# Allegro board RD_T31_STORK_M_V1.0_20190711B.brd
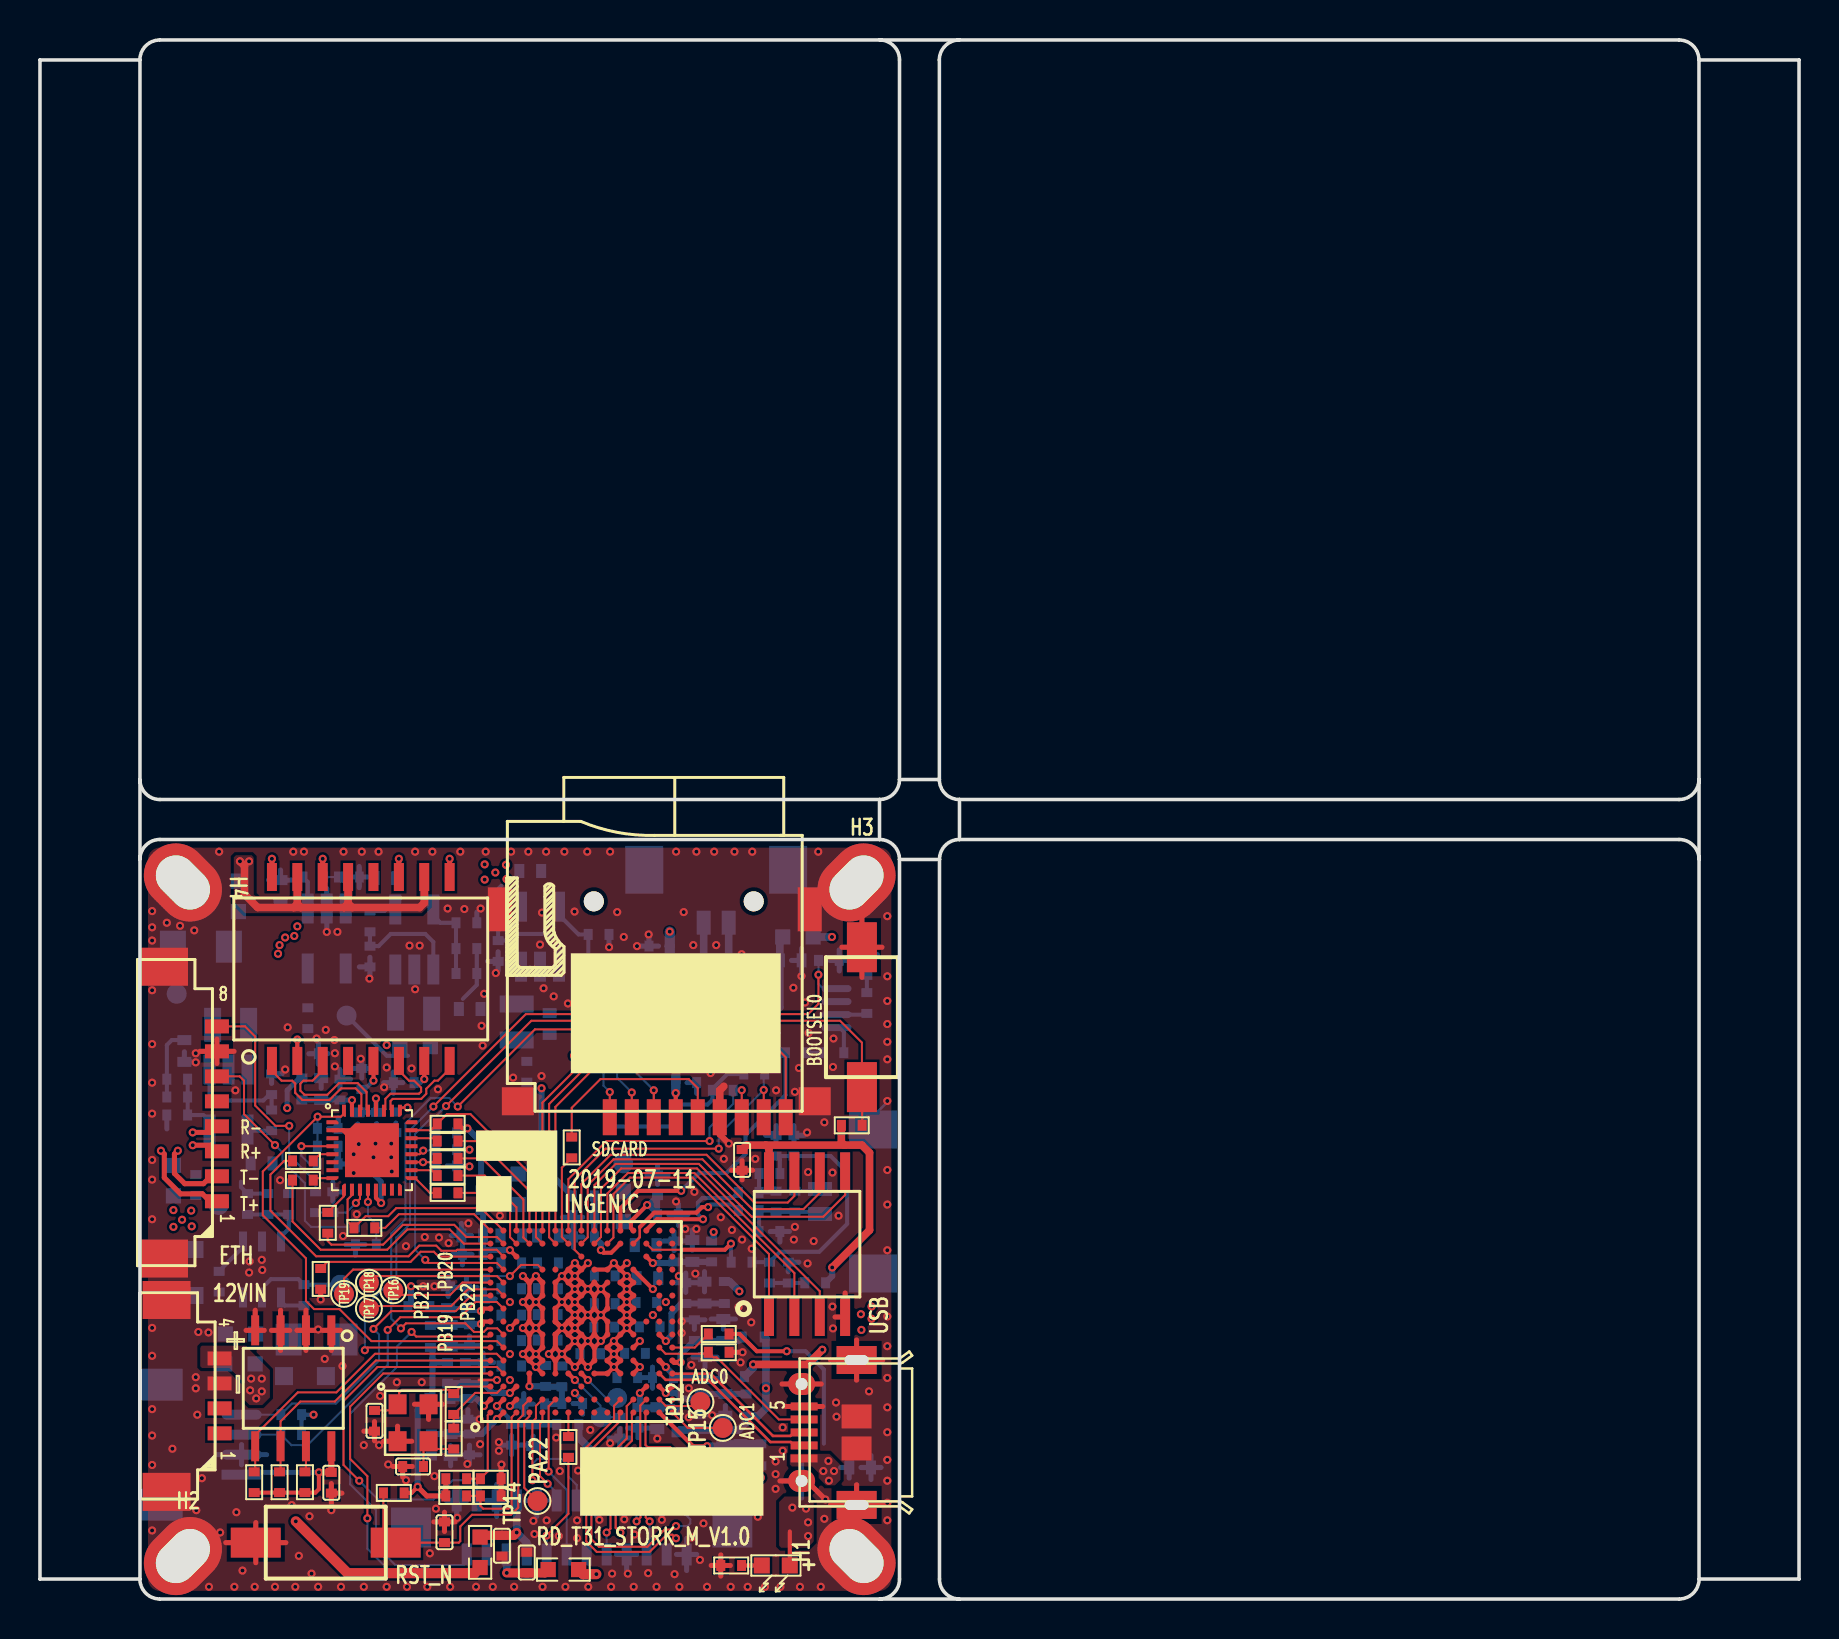
[diagram p0: board, top side]
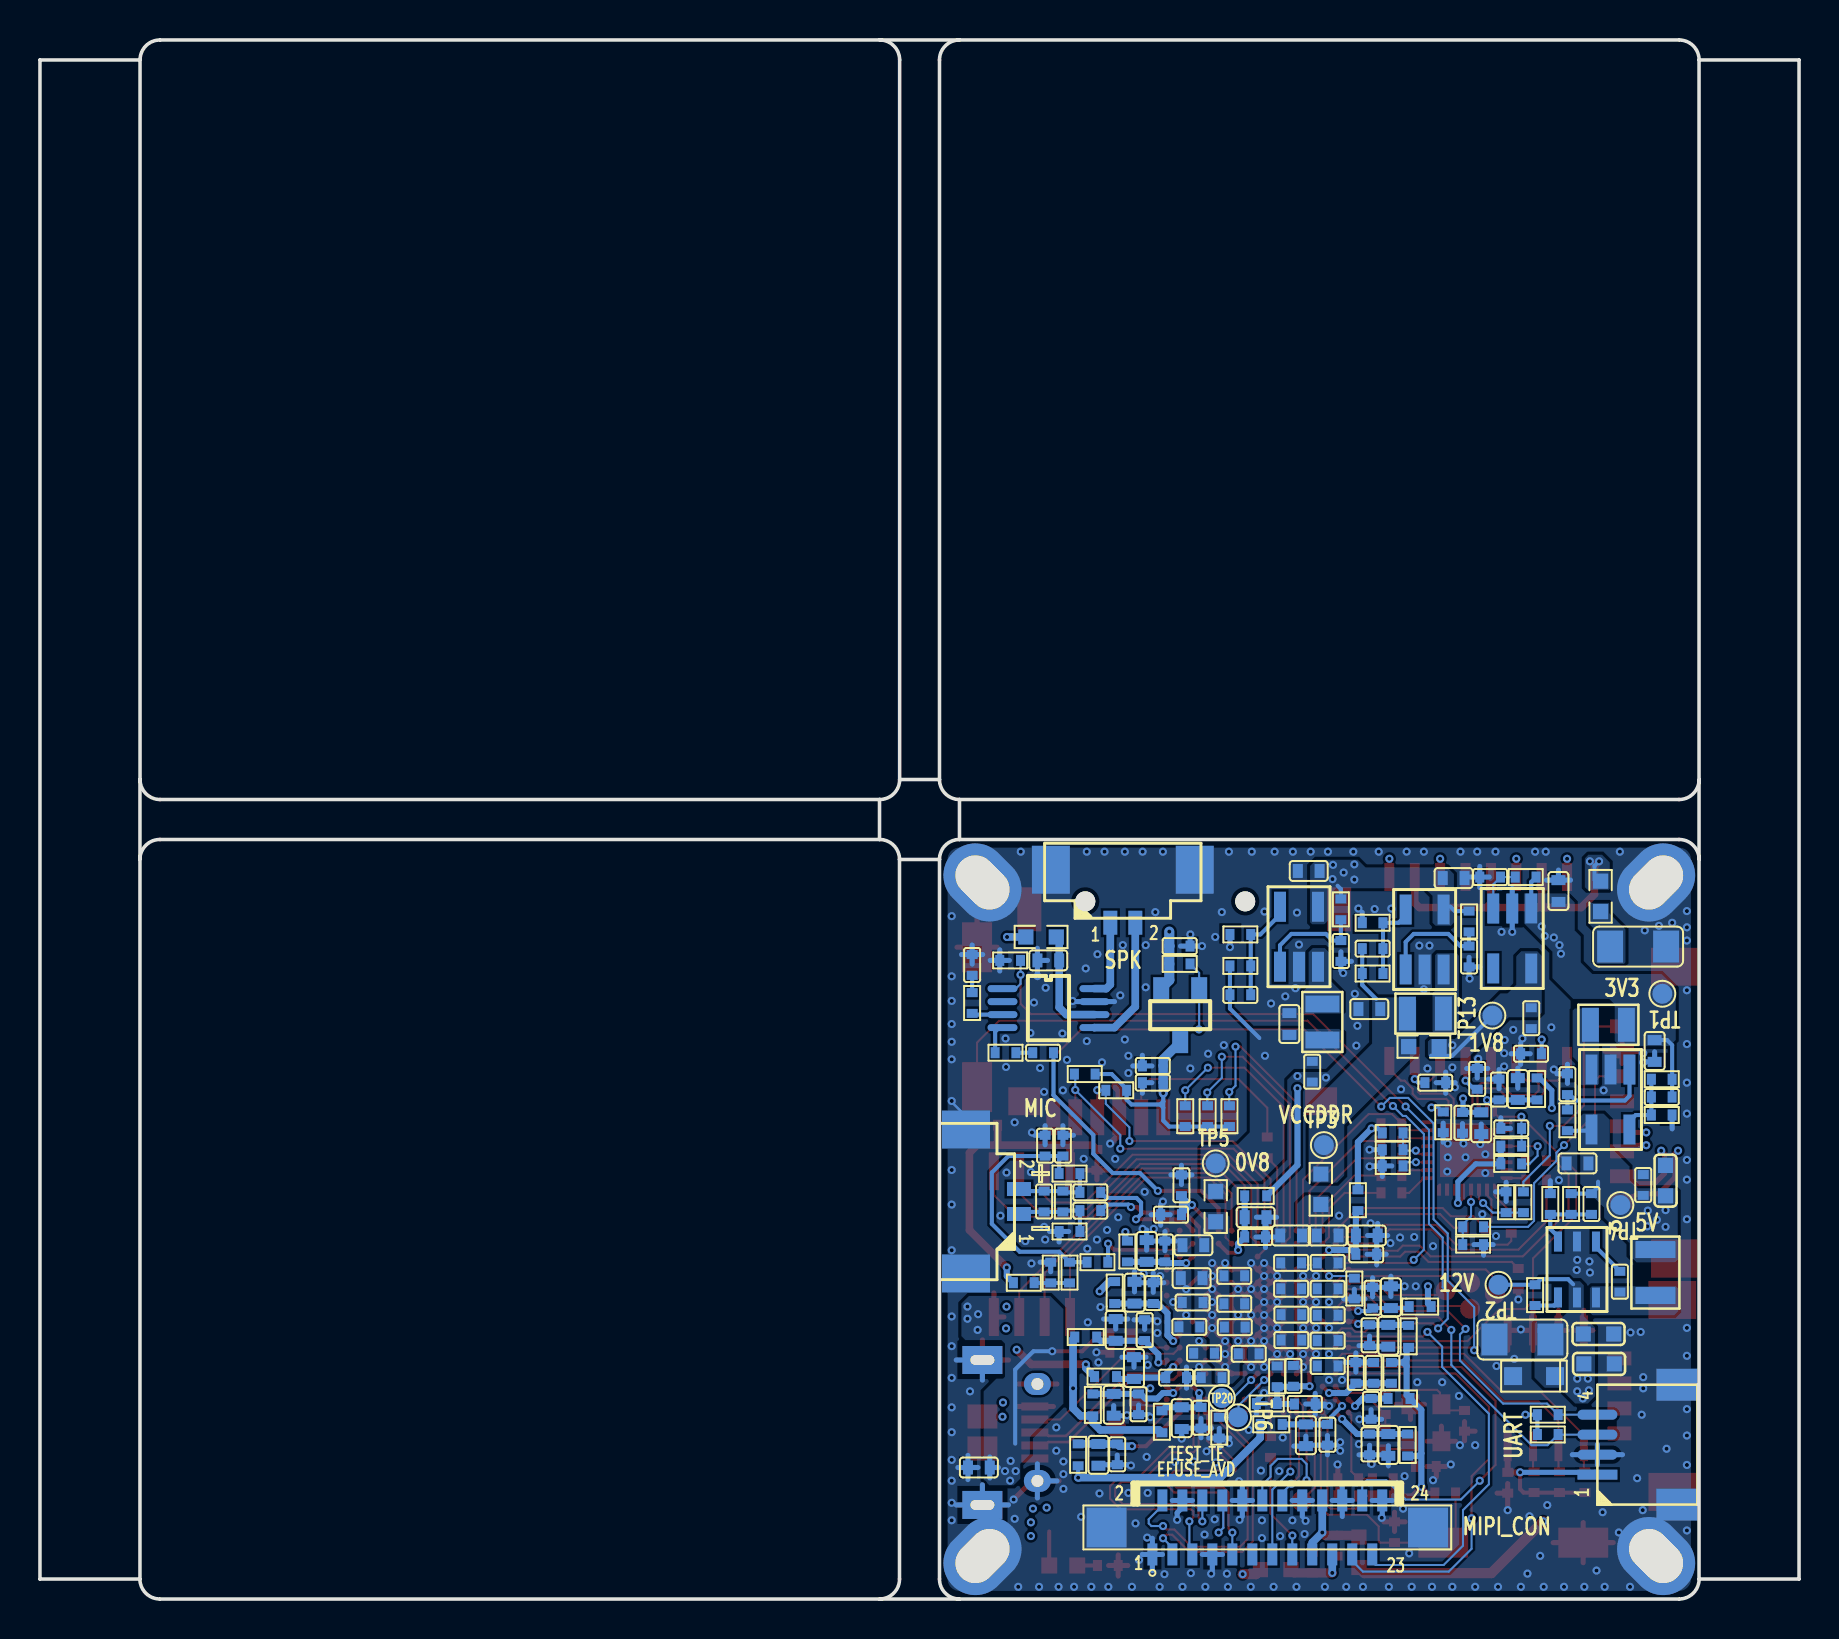
[diagram p1: board, bottom side, seen from below]

Outline 88 x 78 mm; copper layers: TOP, L2_GND, L3_PWR, BOTTOM. Coordinates in mm from the lower left corner of the outline.
Outline path: 5,1 0,1 0,77 5,77 ; 5,1 5,37 ; 5,1 arc(5.29,0.29) 6,0 42,0 ; 5,77 5,41 ; 5,77 arc(5.29,77.71) 6,78 42,78 ; 5,41 5,37 ; 5,41 arc(5.29,40.29) 6,40 42,40 ; 5,37 arc(5.29,37.71) 6,38 42,38 ; 42,40 42,38 ; 42,40 arc(42.71,40.29) 43,41 ; 42,38 arc(42.71,37.71) 43,37 ; 42,78 arc(42.71,77.71) 43,77 43,41 ; 42,78 45.99,78 ; 45.99,78 arc(45.29,77.71) 44.99,77 44.99,41 ; 45.99,78 81.99,78 arc(82.7,77.71) 82.99,77 ; 43,37 43,1 arc(42.71,0.29) 42,0 ; 43,37 45,37 ; 42,0 46,0 ; 46,0 arc(45.29,0.29) 45,1 45,37 ; 46,0 82,0 arc(82.71,0.29) 83,1 ; 43,41 44.99,41 ; 44.99,41 arc(45.29,40.29) 45.99,40 ; 45,37 arc(45.29,37.71) 46,38 ; 46,38 46,39.99 45.99,40 ; 46,38 82,38 arc(82.71,37.71) 83,37 ; 45.99,40 81.99,40 arc(82.7,40.29) 82.99,41 ; 82.99,77 82.99,41 ; 82.99,77 88,77 88,1 83,1 ; 83,37 83,40.99 82.99,41 ; 83,37 83,1

## Design rules (mm)
net group DP1: nets N15378792 N15378804
net group DP2: nets N15378878 N15378898
net group RX: nets RX+ RX-
net group TX: nets TX+ TX-
net group USB90: nets USB_DM0 USB_DP0
net group DEFAULT: nets BOOTSEL0 BOOTSEL1 EXCLKI EXCLKO FX GMAC_CLKOUT GMAC_CRS_DV GMAC_MDC GMAC_MDIO GMAC_RST_N GMAC_RXD0 GMAC_RXD1 GMAC_TXD0 GMAC_TXD1 GMAC_TXEN IR IRCUTN IRCUTP LED LINK/ACT MICBIAS MII MSC0_CLK MSC0_CMD MSC0_D0 MSC0_D1 MSC0_D2 MSC0_D3 N3362923 N3362941 N15313394 N15316757 N15319926 N15320102 N15322230 N15322330 N15358478 N15358482 N15358486 N15358490 N15358494 N15359340 N15359934 N15360440 N15378796 N15379006 N15379034 N15379500 PPRST_N SD0_CD_N SENSOR_RESET SFC_CS_N SFC_SCLK SFC_SIO0 SFC_SIO1 SFC_SIO2 SFC_SIO3 SPEAK_EN SPEED USB_ID
net group MG1: nets MIPI_CLKN MIPI_CLKP MIPI_DATAN0 MIPI_DATAN1 MIPI_DATAP0 MIPI_DATAP1
net group POW: nets AIN AIP AVDD_PHY CODEC_AVDD DDR_VREF DDRPLL_AVD18 HPOUT N04375 N15313450 N15313454 N15316521 N15378850 N15378902 N15378968 N15382667 N15382675 N15382741 N15382761 N15382881 N15384349 N15384381 SADC_AVDD USB_AVD18 USB_AVD33 VDDIO_D VDDMSC0
nets with their own width: min track width 0.127; nets GND

## Placement (name value [footprint] x y rotation side)
C1  22uF-1206  [C1206]  13.84 12.98 0 bottom
C2  10uF  [C0402_E]  11.08 21.79 0 bottom
C3  100nF  [C0402]  11.59 25.76 90 bottom
C4  22pF  [C0402]  6.87 25.12 0 bottom
C5  10uF  [C0402_E]  7.22 27.42 270 bottom
C6  22pF  [C0402]  21.33 32.54 180 bottom
C7  10uF  [C0402_E]  17.28 36.07 180 bottom
C8  100nF  [C0402]  16.51 32.15 270 bottom
C9  10uF  [C0402_E]  21.5 29.52 0 bottom
C10  10nF  [C0402]  8.96 15.88 270 bottom
C11  10uF-0603  [C0603]  10 11.76 180 bottom
C12  10uF-0603  [C0603]  10.03 13.26 180 bottom
C13  22pF  [C0402]  10.38 19.76 270 bottom
C14  10uF-0603  [C0603]  6.68 20.93 90 bottom
C15  100nF  [C0402]  7.79 20.72 90 bottom
C16  22pF  [C0402]  27.95 30.23 0 bottom
C17  10uF  [C0402_E]  24.53 36.43 0 bottom
C18  100nF  [C0402]  22.92 32.42 270 bottom
C19  10uF  [C0402_E]  25.5 28.77 90 bottom
C20  100nF  [C0402]  24.35 26.38 270 bottom
C21  100nF  [C0402]  25.29 11.16 90 bottom
C22  4.7uF  [C0402]  25.4 12.96 0 bottom
C23  100nF  [C0402]  24.72 9.76 0 bottom
C24  10uF  [C0402_E]  25.41 18.19 0 bottom
C25  100nF  [C0402]  23.58 12.93 180 bottom
C26  100nF  [C0402]  23.58 11.66 180 bottom
C27  100nF  [C0402]  23.58 16.82 180 bottom
C28  10nF  [C0402]  25.41 15.52 0 bottom
C29  10uF  [C0402_E]  23.58 18.19 180 bottom
C30  100nF  [C0402]  25.4 14.23 0 bottom
C31  100nF  [C0402]  23.58 14.2 180 bottom
C32  100nF  [C0402]  25.41 16.82 0 bottom
C33  10nF  [C0402]  23.58 15.52 180 bottom
C34  10uF  [C0402_E]  30.39 16.05 0 bottom
C35  10uF  [C0402_E]  30.3 17.7 0 bottom
C36  100nF  [C0402]  28.23 13.6 180 bottom
C37  100nF  [C0402]  27.53 12.27 180 bottom
C38  100nF  [C0402]  28.25 14.77 180 bottom
C39  100nF  [C0402]  29.76 12.3 0 bottom
C40  100nF  [C0402]  28.25 16.17 180 bottom
C41  100nF  [C0402]  30.5 13.62 0 bottom
C42  10nF  [C0402]  30.34 14.84 0 bottom
C43  10nF  [C0402]  29.38 11.08 0 bottom
C45  100nF  [C0402]  21.65 17.25 180 bottom
C47  100nF  [C0402]  21.28 11.31 90 bottom
C48  100nF  [C0402]  22.17 11.31 90 bottom
C49  10uF  [C0402_E]  35.05 7.21 270 bottom
C50  100nF  [C0402]  34.11 7.24 270 bottom
C51  10uF  [C0402_E]  30.88 9.05 270 bottom
C52  100nF  [C0402]  29.92 9.07 270 bottom
C53  10uF  [C0402_E]  27.19 19.1 180 bottom
C54  100nF  [C0402]  27.21 18.11 180 bottom
C55  10uF  [C0402_E]  34.29 9.72 270 bottom
C56  100nF  [C0402]  33.04 9.74 270 bottom
C57  10uF  [C0402_E]  33.27 11.55 90 bottom
C58  100nF  [C0402]  31.16 11.08 180 bottom
C59  100nF  [C0402]  21.48 13.2 270 bottom
C60  100nF  [C0402]  21.33 15.07 90 bottom
C61  100nF  [C0402]  32.74 13.45 90 bottom
C62  100nF  [C0402]  32.3 15.31 90 bottom
C65  100nF  [C0402]  21.48 7.74 270 bottom
C67  12pF  [C0402]  16.73 8.92 90 top
C68  4.7uF  [C0402]  31.42 19.23 180 bottom
C69  12pF  [C0402]  18.67 6.63 0 top
C70  100nF  [C0402]  35.12 21.97 90 top
C72  100nF  [C0402]  14.58 5.82 90 top
C74  4.7uF  [C0402]  24.35 1.83 270 top
C77  4.7uF  [C0402]  30.98 32.67 180 bottom
C80  4.7uF  [C0402]  23.11 2.67 90 top
C81  100nF  [C0402]  32.33 25.83 0 bottom
C84  10uF  [C0402_E]  14.07 25.52 90 bottom
C85  100nF  [C0402]  15.01 25.49 90 bottom
C86  10uF  [C0402_E]  15.9 23.81 270 bottom
C87  100nF  [C0402]  16.84 23.83 270 bottom
C88  100nF  [C0402]  18.2 25.83 0 bottom
C89  100nF  [C0402]  16.1 26.02 270 bottom
C90  100nF  [C0402]  13.41 27.28 180 bottom
C91  1nF/2KV-1206  [C1206]  8.05 32.64 0 bottom
C92  100nF  [C0402]  14.4 23.55 0 bottom
C93  3.3nF  [C0402]  41.37 31.72 90 bottom
C94  3.3nF  [C0402]  37.82 27.33 180 bottom
C95  10uF  [C0402_E]  37.56 31.95 0 bottom
C96  100nF  [C0402]  35.45 19.43 0 bottom
C97  100nF  [C0402]  35.45 20.35 0 bottom
C98  4.7uF  [C0402]  36.83 22.68 90 bottom
C99  100nF  [C0402]  37.72 22.68 90 bottom
C100  4.7uF  [C0402]  20.24 3.34 90 top
C101  4.7uF  [C0402]  32.33 26.67 0 bottom
C102  10uF  [C0402_E]  41.03 6.58 0 bottom
C103  10uF  [C0402_E]  20.54 13.17 270 bottom
C104  10uF  [C0402_E]  20.42 15.1 90 bottom
C105  10uF  [C0402_E]  34.18 13.46 90 bottom
C106  10uF  [C0402_E]  33.24 15.33 90 bottom
C107  10uF  [C0402_E]  20.54 7.71 270 bottom
C111  10uF  [C0402_E]  12.04 35.42 90 bottom
C112  4.7uF  [C0402]  13.39 29.06 270 bottom
C113  100nF  [C0402]  15.45 36.12 0 bottom
C114  10uF  [C0402_E]  24.67 8.19 270 bottom
C115  100nF  [C0402]  23.59 8.22 270 bottom
C116  10uF  [C0402_E]  21.62 18.19 180 bottom
C117  10uF  [C0402_E]  32.64 17.41 90 bottom
C118  100nF  [C0402]  31.72 17.39 90 bottom
C120  100nF  [C0402]  21.41 9.51 270 bottom
C121  100nF  [C0402]  30.9 20.7 270 bottom
C122  100pF  [C0402]  37.77 19.89 90 bottom
D1  BZT52C12S  [SOD323]  13.25 11.15 180 bottom
D2  LED Red  [D0603_LED]  36.81 1.68 180 top
FB1  1000ohm/250mA  [FB0402]  19.53 13.14 270 bottom
FB2  1000ohm/250mA  [FB0402]  18.95 14.63 180 bottom
FB3  1000ohm/250mA  [FB0402]  19.58 7.7 270 bottom
FB4  1000ohm/250mA  [FB0402]  36.06 7.21 270 bottom
FB5  1000ohm/250mA  [FB0402]  31.87 8.87 270 bottom
FB6  1000ohm/250mA  [FB0402]  27.18 20.17 180 bottom
FB7  1000ohm/250mA  [FB0402]  35.33 9.71 270 bottom
FB8  1000ohm/250mA  [FB0402]  34.69 11.13 0 bottom
FB9  1000ohm/250mA  [FB0402]  35.68 13.11 0 bottom
FB10  1000ohm/250mA  [FB0402]  34.24 15.33 90 bottom
FB11  1000ohm/250mA  [FB0402]  13.1 25.52 90 bottom
FB12  1000ohm/250mA  [FB0402]  26.4 8.74 0 bottom
FB13  1000ohm/250mA  [FB0402]  20.01 10.03 180 bottom
H1  MHOBL  [MHOLE_3D0X2D0]  40.85 2.15 90 top
H2  MHOBL  [MHOLE_3D0X2D0]  7.15 2.15 0 top
H3  MHOBL  [MHOLE_3D0X2D0]  40.85 35.85 0 top
H4  MHOBL  [MHOLE_3D0X2D0]  7.15 35.85 270 top
J1  CON4 1.25mm LT  [CON4-1D25-LT]  6.89 10.16 270 top
J3  MICROSD_TF  [TFCARD]  30.76 24.3 180 top
J4  CON8 1.25mm LT  [CON8-1D25-LT]  6.75 24.33 270 top
J5  CON2 1.25mm LT  [CON2-1D25-LT]  33.83 35.94 0 bottom
J7  CON2 1.25mm LT  [CON2-1D25-LT]  41.12 19.89 270 bottom
J9  MICRO USB  [MICROUSB_B_NJ5P]  38.23 8.33 270 top
J18  CON24 0.5mm LT  [FPC-CON24-0D5-LT]  26.6 3.58 180 bottom
J38  CON4 1.0mm WT  [CON4-1D0-WT]  7.59 7.72 90 bottom
L1  2.2uH/1.3A-2016  [L2016]  9.54 28.73 0 bottom
L2  2.2uH/1.3A-2016  [L2016]  18.69 29.29 180 bottom
L3  4.7uH/1.4A-2520  [L2520]  7.18 16.33 90 bottom
L4  2.2uH/1.3A-2016  [L2016]  23.85 28.87 90 bottom
NOREF  -  []  -189.11 -122.58 0 top
NOREF#2  -  []  32.18 6.07 0 top
NOREF#3  -  []  44.75 -10.46 0 top
NOREF#4  -  []  41.27 158.18 0 top
NOREF#5  -  []  -41.62 136.12 0 top
NOREF#6  -  []  5 1 0 top
NOREF#7  -  []  6 0 90 top
NOREF#8  -  []  5.32 37.73 0 top
Q1  WPM3401  [SOT23]  30.96 29.21 0 bottom
R1  100K  [R0402]  11.59 23.95 90 bottom
R2  150K/1%  [R0402]  6.87 26.01 180 bottom
R3  33.2K/1%  [R0402]  6.87 24.22 0 bottom
R4  100K  [R0402]  16.51 33.9 270 bottom
R5  200K/1%  [R0402]  21.33 31.29 180 bottom
R6  100K/1%  [R0402]  21.33 33.83 180 bottom
R7  100K  [R0402]  13.2 15.2 270 bottom
R8  200K/1%  [R0402]  11.4 19.76 270 bottom
R9  27K/1%  [R0402]  12.44 19.76 270 bottom
R10  100K  [R0402]  22.92 34.5 270 bottom
R11  40.2K/1%  [R0402]  27.95 31.68 0 bottom
R12  120K/1%  [R0402]  27.95 33.25 180 bottom
R13  1K  [R0402]  34.58 1.68 180 top
R14  0R-0603  [R0603]  23.92 20.5 270 bottom
R15  0R-0603  [R0603]  29.18 19.64 270 bottom
R16  0R  [R0402]  22.07 19.95 270 bottom
R17  100K/1%  [R0402]  26.11 11.14 90 bottom
R18  0R  [R0402]  20.39 11.31 270 bottom
R19  100K/1%  [R0402]  26.63 9.78 180 bottom
R20  1M  [R0402]  20.7 9.76 90 top
R21  33R  [R0402]  20.7 8.03 90 top
R22  33R  [R0402]  16.23 18.57 180 top
R23  33R  [R0402]  14.4 18.82 90 top
R24  33R  [R0402]  13.15 20.96 0 top
R25  33R  [R0402]  13.15 21.92 0 top
R26  33R  [R0402]  20.39 22.91 180 top
R27  33R  [R0402]  26.44 7.61 90 top
R29  33R  [R0402]  26.6 22.59 90 top
R30  10K  [R0402]  13.25 5.84 90 top
R31  10K  [R0402]  10.71 5.84 270 top
R32  10K  [R0402]  11.98 5.84 270 top
R35  1K  [R0402]  33.96 13.26 0 top
R37  100K  [R0402]  34.16 25.45 0 bottom
R38  100K  [R0402]  30.7 24.16 90 bottom
R39  100K  [R0402]  35.73 26.27 0 bottom
R40  100K  [R0402]  28.49 24.16 90 bottom
R41  100K  [R0402]  29.59 24.16 90 bottom
R42  100K  [R0402]  30.98 31.78 180 bottom
R44  10K  [R0402]  14.4 21.77 0 bottom
R45  10K  [R0402]  20.33 23.32 0 bottom
R46  10K  [R0402]  20.33 22.48 0 bottom
R47  10K  [R0402]  20.33 21.67 0 bottom
R48  10K  [R0402]  14.65 19.85 90 bottom
R49  10K  [R0402]  20.39 23.77 0 top
R50  33R  [R0402]  20.39 21.18 180 top
R51  10K  [R0402]  16.3 17.73 180 bottom
R52  33R  [R0402]  20.39 20.32 180 top
R53  33R  [R0402]  20.39 22.05 180 top
R54  75R/1%-0603  [R0603]  9.93 35.16 90 bottom
R55  10K  [R0402]  14.4 22.66 0 bottom
R56  300R  [R0402]  16.3 18.62 0 bottom
R57  300R  [R0402]  13.79 19.85 270 bottom
R58  6.19K/1%  [R0402]  17.8 23.85 270 bottom
R59  10K  [R0402]  39.47 31.95 0 bottom
R61  68K/1%  [R0402]  41.37 29.82 90 bottom
R62  68K/1%  [R0402]  39.7 27.33 180 bottom
R64  2.2K  [R0402]  36.49 18.39 0 bottom
R65  2.2K  [R0402]  36.49 21.29 180 bottom
R68  0R-0603  [R0603]  22.02 2.34 90 top
R69  0R-0603  [R0603]  26.18 1.47 180 top
R71  100K  [R0402]  40.61 23.7 180 top
R77  100K  [R0402]  17.7 5.31 180 top
R81  1K  [R0402]  14.04 16.02 90 top
R82  10K  [R0402]  33.96 12.35 0 top
R83  240R/1%  [R0402]  22.25 15.53 90 bottom
R85  100K  [R0402]  13.67 36.12 0 bottom
R86  0R-0603  [R0603]  18.77 27.64 0 bottom
R87  0R  [R0402]  33.6 17.39 270 bottom
R89  1K  [R0402]  20.82 6.02 0 top
R90  1K  [R0402]  22.55 6.02 180 top
R91  1K  [R0402]  20.82 5.16 0 top
R92  1K  [R0402]  22.55 5.16 180 top
R93  0R  [R0402]  35.1 16.85 180 bottom
R237  10K  [R0402]  12.57 8.23 180 bottom
R238  10K  [R0402]  12.57 9.22 180 bottom
R246  100K/1%  [R0402]  38.78 15.82 0 bottom
R247  120K/1%  [R0402]  37.44 16.33 270 bottom
R248  0R  [R0402]  36.5 16.33 270 bottom
R249  0R-0603  [R0603]  37.92 33.12 0 bottom
R250  0R  [R0402]  29 8.57 90 bottom
R251  10K  [R0402]  36.83 19.89 90 bottom
SW1  KEY2_SMD  [SW2_SMD]  41.12 29.11 270 top
SW2  KEY2_SMD  [SW2_SMD]  14.3 2.82 0 top
TP1  TP  [TEST_SMD]  6.84 30.28 0 bottom
TP2  TP  [TEST_SMD]  15.03 15.72 0 bottom
TP3  TP  [TEST_SMD]  23.77 22.71 180 bottom
TP4  TP  [TEST_SMD]  8.94 19.71 0 bottom
TP5  TP  [TEST_SMD]  29.18 21.79 180 bottom
TP6  TP  [TEST_SMD]  28.06 9.09 270 bottom
TP12  TP  [TEST_SMD]  33.04 9.86 90 top
TP13  TP  [TEST_SMD]  15.34 29.19 90 bottom
TP14  TP  [TEST_SMD]  24.89 4.9 90 top
TP15  TP  [TEST_SMD]  34.16 8.56 90 top
TP16  TP  [TEST_SMD]  17.67 15.44 90 top
TP17  TP  [TEST_SMD]  16.46 14.53 90 top
TP18  TP  [TEST_SMD]  16.46 15.83 90 top
TP19  TP  [TEST_SMD]  15.21 15.27 90 top
TP20  TP  [TEST_SMD]  28.88 10.06 180 bottom
U1  LN5058  [SOT23-5]  9.43 24.99 0 bottom
U2  LN5058  [SOT23-5]  18.73 33 180 bottom
U3  ETA8120  [SOT23-6]  11.11 16.49 270 bottom
U4  LN5058  [SOT23-5]  25.02 33.14 180 bottom
U6  GD25Q127CSIG  [WSOP8_1D27]  38.38 17.75 90 top
U7  AT24C02  [SOP8_1D27]  12.67 10.54 270 top
U8  IP101GR  [QFN32_0D4_IP101GR]  16.61 22.46 0 top
U9  FC1680C  [QFP16_1D27]  16.05 31.52 90 top
U10  CS8302M  [MSOP8_0D65]  37.55 29.56 270 bottom
U11  S-1339D18  [SOT23-5]  14.35 33.05 0 bottom
U12  T31 BGA192  [BGA192_0D65_T31]  27.09 13.88 90 top
Y1  24M 2016  [CRY_2D5X2D0]  18.67 8.82 270 top

## Library data of the parts
C1-C43 C45 C47-C62 C65 C67-C70 C72 C74 C77 C80 C81 C84-C107 C111-C118 C120-C122 = CAP
D1 = DIODE_WY
D2 = LED_1
FB1-FB13 = BEAD
H1-H4 = MHOLE1
J1 = CON_4x1
J3 = MMC_SD
J4 = CON_8x1
J5 J7 = CON_2X1
J9 = MICROUSB_0
J18 = FPCCON_12x2
J38 = CON_4X1
L1-L4 = INDUCTOR
Q1 = P_MOS
R1-R27 R29-R32 R35 R37-R42 R44-R59 R61 R62 R64 R65 R68 R69 R71 R77 R81-R83 R85-R87 R89-R93 R237 R238 R246-R251 = RES
SW1 SW2 = PUSHBUTTON
TP1-TP6 TP12-TP20 = TP
U1 U2 U4 = SY8088
U3 = SY8120
U6 = SPI_NOR
U7 = 24C02
U8 = IP101GR
U9 = FC1680C
U10 = CS8302
U11 = SGM2019
U12 = T31_BGA192
Y1 = XTAL_P4

## Footprints (pads in the part's own frame, mm; a bottom-side part is the same pattern mirrored in y, then rotated)
BGA192_0D65_T31
  round 0.3 smd: A1(-4.55,4.55) A2(-3.9,4.55) A3(-3.25,4.55) A4(-2.6,4.55) A5(-1.95,4.55) A6(-1.3,4.55) A7(-0.65,4.55) A8(0,4.55) A9(0.65,4.55) A10(1.3,4.55) A11(1.95,4.55) A12(2.6,4.55) A13(3.25,4.55) A14(3.9,4.55) A15(4.55,4.55) B1(-4.55,3.9) B2(-3.9,3.9) B3(-3.25,3.9) B4(-2.6,3.9) B5(-1.95,3.9) B6(-1.3,3.9) B7(-0.65,3.9) B8(0,3.9) B9(0.65,3.9) B10(1.3,3.9) B11(1.95,3.9) B12(2.6,3.9) B13(3.25,3.9) B14(3.9,3.9) B15(4.55,3.9) C1(-4.55,3.25) C2(-3.9,3.25) C3(-3.25,3.25) C8(0,3.25) C13(3.25,3.25) C14(3.9,3.25) C15(4.55,3.25) D1(-4.55,2.6) D2(-3.9,2.6) D4(-2.6,2.6) D5(-1.95,2.6) D6(-1.3,2.6) D7(-0.65,2.6) D8(0,2.6) D9(0.65,2.6) D10(1.3,2.6) D11(1.95,2.6) D14(3.9,2.6) D15(4.55,2.6) E1(-4.55,1.95) E2(-3.9,1.95) E4(-2.6,1.95) E5(-1.95,1.95) E6(-1.3,1.95) E7(-0.65,1.95) E8(0,1.95) E9(0.65,1.95) E10(1.3,1.95) E11(1.95,1.95) E12(2.6,1.95) E14(3.9,1.95) E15(4.55,1.95) F1(-4.55,1.3) F2(-3.9,1.3) F4(-2.6,1.3) F5(-1.95,1.3) F6(-1.3,1.3) F7(-0.65,1.3) F8(0,1.3) F9(0.65,1.3) F10(1.3,1.3) F11(1.95,1.3) F12(2.6,1.3) F14(3.9,1.3) F15(4.55,1.3) G1(-4.55,0.65) G2(-3.9,0.65) G4(-2.6,0.65) G5(-1.95,0.65) G6(-1.3,0.65) G7(-0.65,0.65) G8(0,0.65) G9(0.65,0.65) G10(1.3,0.65) G11(1.95,0.65) G12(2.6,0.65) G14(3.9,0.65) G15(4.55,0.65) H1(-4.55,0) H2(-3.9,0) H3(-3.25,0) H4(-2.6,0) H5(-1.95,0) H6(-1.3,0) H7(-0.65,0) H8(0,0) H9(0.65,0) H10(1.3,0) H11(1.95,0) H12(2.6,0) H13(3.25,0) H14(3.9,0) H15(4.55,0) J1(-4.55,-0.65) J2(-3.9,-0.65) J4(-2.6,-0.65) J5(-1.95,-0.65) J6(-1.3,-0.65) J7(-0.65,-0.65) J8(0,-0.65) J9(0.65,-0.65) J10(1.3,-0.65) J11(1.95,-0.65) J12(2.6,-0.65) J14(3.9,-0.65) J15(4.55,-0.65) K1(-4.55,-1.3) K2(-3.9,-1.3) K4(-2.6,-1.3) K5(-1.95,-1.3) K6(-1.3,-1.3) K7(-0.65,-1.3) K8(0,-1.3) K9(0.65,-1.3) K10(1.3,-1.3) K11(1.95,-1.3) K12(2.6,-1.3) K14(3.9,-1.3) K15(4.55,-1.3) L1(-4.55,-1.95) L2(-3.9,-1.95) L4(-2.6,-1.95) L5(-1.95,-1.95) L6(-1.3,-1.95) L7(-0.65,-1.95) L8(0,-1.95) L9(0.65,-1.95) L10(1.3,-1.95) L11(1.95,-1.95) L12(2.6,-1.95) L14(3.9,-1.95) L15(4.55,-1.95) M1(-4.55,-2.6) M2(-3.9,-2.6) M4(-2.6,-2.6) M5(-1.95,-2.6) M6(-1.3,-2.6) M7(-0.65,-2.6) M8(0,-2.6) M9(0.65,-2.6) M10(1.3,-2.6) M11(1.95,-2.6) M12(2.6,-2.6) M14(3.9,-2.6) M15(4.55,-2.6) N1(-4.55,-3.25) N2(-3.9,-3.25) N3(-3.25,-3.25) N8(0,-3.25) N13(3.25,-3.25) N14(3.9,-3.25) N15(4.55,-3.25) P1(-4.55,-3.9) P2(-3.9,-3.9) P3(-3.25,-3.9) P4(-2.6,-3.9) P5(-1.95,-3.9) P6(-1.3,-3.9) P7(-0.65,-3.9) P8(0,-3.9) P9(0.65,-3.9) P10(1.3,-3.9) P11(1.95,-3.9) P12(2.6,-3.9) P13(3.25,-3.9) P14(3.9,-3.9) P15(4.55,-3.9) R1(-4.55,-4.55) R2(-3.9,-4.55) R3(-3.25,-4.55) R4(-2.6,-4.55) R5(-1.95,-4.55) R6(-1.3,-4.55) R7(-0.65,-4.55) R8(0,-4.55) R9(0.65,-4.55) R10(1.3,-4.55) R11(1.95,-4.55) R12(2.6,-4.55) R13(3.25,-4.55) R14(3.9,-4.55) R15(4.55,-4.55)
C0402
  rect 0.45x0.55 smd: 1(-0.52,0) 2(0.52,0)
C0402_E
  rect 0.5x0.7 smd: 1(-0.545,0) 2(0.545,0)
C0603
  rect 0.76x0.76 smd: 1(-0.762,0) 2(0.762,0)
C1206
  rect 1.3x1.6 smd: 1(-1.4,0) 2(1.4,0)
CON2-1D25-LT
  rect 0.7x1.2 smd: 1(0.625,2.1) 2(-0.625,2.1)
  rect 1.9x2.4 smd: 3(-3.6,-0.55) 4(3.6,-0.55)
CON4-1D0-WT
  rect 0.5x2 smd: 1(-1.5,2.5)
  oval 0.5x2 smd: 2(-0.5,2.5) 3(0.5,2.5) 4(1.5,2.5)
  rect 1.6x2.1 smd: 5(3,-1.5) 6(-3,-1.5)
CON4-1D25-LT
  rect 0.7x1.2 smd: 1(1.875,2.1) 2(0.625,2.1) 3(-0.625,2.1) 4(-1.875,2.1)
  rect 1.9x2.4 smd: 5(-4.8,-0.55) 6(4.8,-0.55)
CON8-1D25-LT
  rect 0.7x1.2 smd: 1(4.435,2.1) 2(3.185,2.1) 3(1.935,2.1) 4(0.685,2.1) 5(-0.565,2.1) 6(-1.815,2.1) 7(-3.065,2.1) 8(-4.315,2.1)
  rect 1.9x2.4 smd: 9(-7.3,-0.55) 10(7.3,-0.55)
CRY_2D5X2D0
  rect 1x0.9 smd: 1(-0.925,-0.775) 2(0.925,-0.775) 3(0.925,0.775) 4(-0.925,0.775)
D0603_LED
  rect 0.8x0.8 smd: 1(-0.7,0) 2(0.7,0)
FB0402
  rect 0.45x0.55 smd: 1(-0.55,0) 2(0.55,0)
FPC-CON24-0D5-LT
  rect 0.5x1.1 smd: 1(-5.75,-1.35) 2(-5.25,1.35) 3(-4.75,-1.35) 4(-4.25,1.35) 5(-3.75,-1.35) 6(-3.25,1.35) 7(-2.75,-1.35) 8(-2.25,1.35) 9(-1.75,-1.35) 10(-1.25,1.35) 11(-0.75,-1.35) 12(-0.25,1.35) 13(0.25,-1.35) 14(0.75,1.35) 15(1.25,-1.35) 16(1.75,1.35) 17(2.25,-1.35) 18(2.75,1.35) 19(3.25,-1.35) 20(3.75,1.35) 21(4.25,-1.35) 22(4.75,1.35) 23(5.25,-1.35) 24(5.75,1.35)
  rect 2x2 smd: 25(-8.04,0) 26(8.04,0)
L2016
  rect 0.85x1.7 smd: 1(0.9,0) 2(-0.9,0)
L2520
  rect 0.85x2 smd: 1(-1.15,0) 2(1.15,0)
MHOLE_3D0X2D0
  oval 4.2x3.2 hole 3x2 rot 45: 1(0,0)
MICROUSB_B_NJ5P
  rect 0.4x1.35 smd: 1(1.3,0) 2(0.65,0) 3(0,0) 4(-0.65,0) 5(-1.3,0)
  rect 1.4x2 hole 0.5x1.2: 6(3.625,2.625) 7(-3.625,2.625)
  oval 1.1x1.35 hole 0.6: 8(-2.425,-0.125) 9(2.425,-0.125)
  rect 1.2x1.5 smd: 10(-0.8,2.625) 11(0.8,2.625)
MSOP8_0D65
  oval 0.35x1.5 smd: 1(-0.975,-2.3) 2(-0.325,-2.3) 3(0.325,-2.3) 4(0.975,-2.3) 5(0.975,2.3) 6(0.325,2.3) 7(-0.325,2.3) 8(-0.975,2.3)
QFN32_0D4_IP101GR
  custom 0.599x0.198 smd: 1(-1.975,1.4) 8(-1.975,-1.4) 17(1.975,-1.4) 24(1.975,1.4)
  rect 0.6x0.2 smd: 2(-1.975,1) 3(-1.975,0.6) 4(-1.975,0.2) 5(-1.975,-0.2) 6(-1.975,-0.6) 7(-1.975,-1) 18(1.975,-1) 19(1.975,-0.6) 20(1.975,-0.2) 21(1.975,0.2) 22(1.975,0.6) 23(1.975,1)
  custom 0.198x0.599 smd: 9(-1.4,-1.975) 16(1.4,-1.975) 25(1.4,1.975) 32(-1.4,1.975)
  rect 0.2x0.6 smd: 10(-1,-1.975) 11(-0.6,-1.975) 12(-0.2,-1.975) 13(0.2,-1.975) 14(0.6,-1.975) 15(1,-1.975) 26(1,1.975) 27(0.6,1.975) 28(0.2,1.975) 29(-0.2,1.975) 30(-0.6,1.975) 31(-1,1.975)
  custom 2.697x2.697 smd: 33(0,0)
QFP16_1D27
  rect 1.4x0.5 smd: 1(-4.6,4.445) 2(-4.6,3.175) 3(-4.6,1.905) 4(-4.6,0.635) 5(-4.6,-0.635) 6(-4.6,-1.905) 7(-4.6,-3.175) 8(-4.6,-4.445) 9(4.6,-4.445) 10(4.6,-3.175) 11(4.6,-1.905) 12(4.6,-0.635) 13(4.6,0.635) 14(4.6,1.905) 15(4.6,3.175) 16(4.6,4.445)
R0402
  rect 0.45x0.55 smd: 1(-0.52,0) 2(0.52,0)
R0603
  rect 0.76x0.76 smd: 1(-0.762,0) 2(0.762,0)
SOD323
  rect 0.9x0.9 smd: 1(-1.05,0) 2(1.05,0)
SOP8_1D27
  rect 1.5x0.4 smd: 1(-2.9,1.905) 2(-2.9,0.635) 3(-2.9,-0.635) 4(-2.9,-1.905) 5(2.9,-1.905) 6(2.9,-0.635) 7(2.9,0.635) 8(2.9,1.905)
SOT23
  rect 0.8x1.1 smd: 1(-0.95,-1.35) 2(0.95,-1.35) 3(0,1.35)
SOT23-5
  rect 0.6x1.5 smd: 1(-0.95,-1.5) 2(0,-1.5) 3(0.95,-1.5) 4(0.95,1.5) 5(-0.95,1.5)
SOT23-6
  rect 1x0.4 smd: 1(-1.4,0.95) 2(-1.4,0) 3(-1.4,-0.95) 4(1.4,-0.95) 5(1.4,0) 6(1.4,0.95)
SW2_SMD
  rect 2.5x1.5 smd: 1(-3.5,0) 2(3.5,0)
TEST_SMD
  round 1 smd: 1(0,0)
TFCARD
  round 1 hole 1 unplated: (-4.95,-10.6) (3.05,-10.6)
  rect 0.7x1.8 smd: 1(2.25,0.2) 2(1.15,0.2) 3(0.05,0.2) 4(-1.05,0.2) 5(-2.15,0.2) 6(-3.25,0.2) 7(-4.35,0.2) 8(-5.45,0.2) 9(-6.55,0.2)
  rect 1.6x1.4 smd: 10(-8,-0.6) 13(6.85,-0.6)
  rect 1.2x2.2 smd: 11(-7.75,-10.2) 12(7.75,-10.2)
WSOP8_1D27
  rect 1.9x0.5 smd: 1(-3.645,1.905) 2(-3.645,0.635) 3(-3.645,-0.635) 4(-3.645,-1.905) 5(3.645,-1.905) 6(3.645,-0.635) 7(3.645,0.635) 8(3.645,1.905)

## Nets
AVDD_PHY: C84.1 C85.1 FB11.1 U8.31(AVDD33)
GND: C1.2 C2.2 C3.2 C5.2 C7.2 C8.2 C9.2 C11.2 C12.2 C14.2 C15.2 C17.2 C18.2 C19.2 C20.2 C22.2 C23.1 C24.2 C25.2 C26.2 C27.2 C28.2 C29.2 C30.2 C31.2 C32.2 C33.2 C34.2 C35.2 C36.2 C37.2 C38.2 C39.2 C40.2 C41.2 C42.2 C43.2 C45.2 C47.2 C48.2 C49.2 C50.2 C51.2 C52.2 C53.2 C54.2 C55.2 C56.2 C57.2 C58.2 C59.2 C60.2 C61.2 C62.2 C65.2 C67.1 C68.1 C69.1 C70.1 C72.1 C74.1 C77.2 C80.1 C81.2 C84.2 C85.2 C86.2 C87.2 C88.1 C89.1 C90.1 C91.1 C92.2 C93.2 C95.2 C98.2 C99.2 C100.2 C101.2 C102.2 C103.2 C104.2 C105.2 C106.2 C107.2 C111.2 C112.2 C113.2 C114.2 C115.2 C116.2 C117.2 C118.2 C120.2 C121.1 D1.1 H1.1(A) H2.1(A) H3.1(A) H4.1(A) J1.3 J1.5(S1) J1.6(S2) J3.6(VSS2) J3.10(GND_2) J3.11(GND_1) J3.12(PAD1) J3.13(PAD2) J4.7 J4.9(S1) J4.10(S2) J5.3(S1) J5.4(S2) J7.3(S1) J7.4(S2) J9.5(GND1) J9.6(GND2) J9.7(GND3) J9.8(GND4) J9.9(GND5) J9.10(GND6) J9.11(GND7) J18.1 J18.4 J18.7 J18.10 J18.16 J18.20 J18.24 J18.25(S1) J18.26(S2) J38.2 J38.5(S1) J38.6(S2) R3.1 R6.1 R9.1 R12.1 R13.2 R19.1 R46.2 R47.2 R48.2 R51.2 R58.2 R59.2 R64.2 R81.1 R82.2 R83.1 R90.1 R92.1 R247.1 R250.1 SW1.1 SW2.1 U1.2(GND) U2.2(GND) U3.2(GND) U4.2(GND) U6.4(GND) U7.1(A0) U7.2(A1) U7.3(A2) U7.4(GND) U8.2(X1) U8.33(GND_EP) U10.7(GND) U11.2(GND) U12.C2(PLL_VSS) U12.C8(DDRPLL_VSSA) U12.F4(VSSIO_OSC) U12.F5(VSS_1) U12.F6(VSS_2) U12.F7(VSS_3) U12.F8(VSS_4) U12.F9(VSS_5) U12.F10(VSS_6) U12.F11(VSS_7) U12.G5(VSS_8) U12.G6(VSS_9) U12.G7(VSS_10) U12.G8(VSS_11) U12.G9(VSS_12) U12.G10(VSS_13) U12.G11(VSS_14) U12.G12(VSS_15) U12.H5(VSS_16) U12.H6(VSS_17) U12.H7(VSS_18) U12.H8(VSS_19) U12.H9(VSS_20) U12.H10(VSS_21) U12.H11(VSS_22) U12.H12(VSS_23) U12.J5(VSS_24) U12.J6(VSS_25) U12.J7(VSS_26) U12.J8(VSS_27) U12.J9(VSS_28) U12.J10(VSS_29) U12.J11(VSS_30) U12.K7(VSS_31) U12.K8(VSS_32) U12.K9(VSS_33) U12.K10(VSS_34) U12.K11(VSS_35) U12.M4(MIPI_AVSS) U12.M5(ADC_AVSS) U12.M6(USB_AVSS) U12.M12(CODEC_AVSS) Y1.2 Y1.4
VCC_0V8: C16.2 C19.1 C20.1 FB2.2 FB4.2 FB10.2 FB12.2 L4.2 R11.2 R15.1 TP5.1
VCC_1V8: C112.1 FB1.2 FB3.2 FB5.2 FB6.2 FB7.2 FB9.2 FB13.2 R18.1 R77.1 R86.1 R89.1 R91.1 TP13.1 U11.5(VOUT)
VCC_3V3: C4.1 C5.1 C70.2 C72.2 C77.1 C111.1 D2.1(ANODE) FB8.2 FB11.2 J38.1 L1.2 Q1.2(SOURCE) R2.2 R16.1 R30.1 R31.2 R32.2 R42.1 R44.2 R45.2 R49.2 R55.2 R69.1 R71.2 R85.1 R87.1 R237.1 R238.1 R246.2 TP1.1 U6.8(VCC) U7.8(VCC) U8.13(VDD_IO) U11.1(VIN)
VCC_5V: C2.1 C7.1 C13.1 C14.1 C15.1 C17.1 C102.1 J9.1(VBUS) L3.2 R1.1 R4.1 R8.1 R10.1 R35.2 R68.1 R249.2 TP4.1 U1.4(IN) U2.4(IN) U4.4(IN)
VCC_12V: C1.1 C11.1 C12.1 D1.2 J1.4 R7.1 TP2.1 U3.5(VIN)
VCC_DDR: C6.1 C9.1 L2.2 R5.1 R14.1 R86.2 TP3.1
VDD: C34.1 C35.1 C36.1 C37.1 C38.1 C39.1 C40.1 C41.1 C42.1 C43.1 R15.2 U12.J4(VDD_1) U12.J12(VDD_2) U12.K4(VDD_3) U12.K5(VDD_4) U12.K6(VDD_5) U12.K12(VDD_6) U12.L4(VDD_7) U12.L5(VDD_8) U12.L6(VDD_9) U12.L7(VDD_10) U12.L8(VDD_11) U12.L9(VDD_12) U12.L10(VDD_13) U12.L11(VDD_14) U12.L12(VDD_15) U12.M7(VDD_16) U12.M8(VDD_17) U12.M9(VDD_18) U12.M10(VDD_19) U12.M11(VDD_20)
VDDIO1: C45.1 C116.1 R16.2 U12.C13(VDDIO1)
VDDIO2: C117.1 C118.1 R87.2 U12.N13(VDDIO2)
VDDIO_D: C47.1 C48.1 R18.2 U12.C3(VDDIO0)
VDDIO_OSC: C120.1 FB13.1 U12.A2(VDDIO_OSC)
VDDMEM: C21.2 C22.1 C24.1 C25.1 C26.1 C27.1 C28.1 C29.1 C30.1 C31.1 C32.1 C33.1 R14.2 R17.2 U12.D5(VDDMEM_1) U12.D6(VDDMEM_2) U12.D7(VDDMEM_3) U12.D8(VDDMEM_4) U12.D9(VDDMEM_5) U12.D10(VDDMEM_6) U12.D11(VDDMEM_7) U12.E4(DDRVDD_1) U12.E5(DDRVDD_2) U12.E6(DDRVDD_3) U12.E7(DDRVDD_4) U12.E8(DDRVDD_5) U12.E9(DDRVDD_6) U12.E10(DDRVDD_7) U12.E11(DDRVDD_8)
VDDMSC0: C81.1 C101.1 J3.4(VDD) Q1.3(DRAIN) R37.1 R38.1 R39.1 R40.1 R41.1
ADC0: TP12.1 U12.P2(ADC_AUX0)
ADC1: TP15.1 U12.R1(ADC_AUX1)
AIN: C96.1 U12.M14(MICLN)
AIP: C97.1 U12.N15(MICLP)
BOOTSEL0: R71.1 SW1.2 U12.B12(BOOT_SEL0_PC00)
BOOTSEL1: R81.2 U12.A13(BOOT_SEL1_PC01)
CODEC_AVDD: C53.1 C54.1 FB6.1 U12.L14(CODEC_AVDD)
DDR_VREF: C21.1 C23.2 R17.1 R19.2 U12.D4(DDRVREF)
DDRPLL_AVD08: C60.1 C104.1 FB2.1 U12.A9(DDRPLL_VCCD)
DDRPLL_AVD18: C59.1 C103.1 FB1.1 U12.A8(DDRPLL_VCCA)
EFUSE_AVD: R250.2 TP6.1 U12.G4(EFUSE_AVD)
EXCLKI: C67.2 R20.2 U12.A3(EXCLK_I) Y1.1
EXCLKO: R20.1 R21.2 U12.B3(EXCLK_O)
FX: R47.1 R53.2 U8.19(RXDV/CRS_DV/FX_HEN)
GMAC_CLKOUT: R22.2 U8.10(TXCLK/50M_CLKI) U12.B15(GMAC_TXCLK_SLCD_D0_PB06)
GMAC_CRS_DV: R53.1 U12.D14(GMAC_RXDV_MSC1_CMD_I2S_SDTI_SLC)
GMAC_MDC: R26.2 U8.22(MDC)
GMAC_MDIO: R49.1 U8.23(MDIO) U12.E14(GMAC_MDIO_MSC1_D1_SLCD_D5_PB11)
GMAC_RST_N: C92.1 R55.1 U8.32(RESET_N) U12.B6(PWM3_SSI1_DR_DMIC_CLK_PB28)
GMAC_RXD0: R50.1 U12.C15(GMAC_RXD0_I2S_DAC_LRCK_SLCD_WR_)
GMAC_RXD1: R52.1 U12.C14(GMAC_RXD1_SLCD_TE_PB16)
GMAC_TXD0: R23.2 U8.9(TXD0)
GMAC_TXD1: R24.2 U8.8(TXD1)
GMAC_TXEN: R25.2 U8.5(TXEN)
HPOUT: C94.2 U12.L15(HPOUTL)
I2C0_SCK: J18.14 U12.E1(SMB0_SCK_SD7_PA13)
I2C0_SDA: J18.13 U12.F2(SMB0_SDA_SD6_PA12)
I2C1_SCK: R32.1 U7.6(SCL) U12.A5(SMB1_SCK_SSI1_CLK_PB26)
I2C1_SDA: R31.1 U7.5(SDA) U12.B5(SMB1_SDA_SSI1_CE0_PB25)
IR: J18.23 U12.A7(SSI1_CLK_DMIC_DAT0_PB29)
IRCUTN: J18.22 U12.B4(PWM1_SSI1_DR_PB18)
IRCUTP: J18.21 U12.A4(PWM0_SSI1_DT_PB17)
LED: R45.1 R46.1 U8.20(CRS/LEDMOD)
LINK/ACT: R48.1 R57.2 U8.11(LED0/PHY_AD0)
MCLK: R27.2 U12.G1(DVP_MCLK_SA1_PA15)
MICBIAS: R93.2 U12.N14(MICBIAS)
MII: R44.1 U8.4(COL/RMII)
MIPI_3V3: C74.2 J18.19 R69.2
MIPI_5V: C80.2 J18.17 J18.18 R68.2
MIPI_AVD08: C49.1 C50.1 FB4.1 U12.P1(MIPI_AVD08)
MIPI_AVD18: C51.1 C52.1 FB5.1 U12.N3(MIPI_AVD18)
MIPI_CLKN: J18.8 U12.M1(DVP_D3_MIPI_CLKN)
MIPI_CLKP: J18.9 U12.M2(DVP_D2_MIPI_CLKP)
MIPI_DATAN0: J18.2 U12.L1(DVP_D5_MIPI_DATAN0)
MIPI_DATAN1: J18.5 U12.N1(DVP_D1_MIPI_DATAN1)
MIPI_DATAP0: J18.3 U12.L2(DVP_D4_MIPI_DATAP0)
MIPI_DATAP1: J18.6 U12.N2(DVP_D0_MIPI_DATAP1)
MIPI_MCLK: J18.15 R27.1
MSC0_CLK: J3.5(CLK) R29.2
MSC0_CMD: J3.3(CMD) R38.2 U12.F15(MSC0_CMD_SSI_SLV_CE0_PB05)
MSC0_D0: J3.7(DAT0) R37.2 U12.G15(MSC0_D0_SSI_SLV_DT_PB00)
MSC0_D1: J3.8(DAT1) R39.2 U12.H13(MSC0_D1_SSI_SLV_DR_PB01)
MSC0_D2: J3.1(DAT2) R40.2 U12.E15(MSC0_D2_PB02)
MSC0_D3: J3.2(DAT3) R41.2 U12.F14(MSC0_D3_PB03)
PA22: TP14.1 U12.D1(WAIT_PWM1_PA22)
PB19: TP17.1 U12.B10(UART0_RXD_TDI_PB19)
PB20: TP18.1 U12.B11(UART0_CTS_I2S_ADC_BCLK_SLCD_CS_)
PB21: TP19.1 U12.A12(UART0_RTS_I2S_DAC_BCLK_SLCD_DC_)
PB22: TP16.1 U12.A11(UART0_TXD_TDO_SLCD_RDY_PB22)
PLL_VDD: C114.1 C115.1 FB12.1 U12.B2(PLL_VDD)
PLL_VDDHV: C65.1 C107.1 FB3.1 U12.B1(PLL_VDDHV)
PPRST_N: C100.1 R77.2 SW2.2 U12.D2(PPRST_)
RX+: J4.3 U9.11(RX+/TX+)
RX-: J4.4 U9.9(RX-/TX-)
SADC_AVDD: C55.1 C56.1 FB7.1 U12.P3(ADC_VREF) U12.R3(ADC_AVDD)
SD0_CD_N: J3.9(CD) Q1.1(GATE) R42.2 U12.A6(DRV_VBUS_PWM2_SSI1_DT_PB27)
SENSOR_RESET: J18.12 U12.E2(SA2_PA18)
SFC_CS_N: U6.1(C\S\) U12.K14(SFC_CE0_PA28)
SFC_SCLK: U6.6(SCLK) U12.H14(SFC_CLK_PA27)
SFC_SIO0: U6.5(SI/SIO0) U12.J15(SFC_DT_PA23)
SFC_SIO1: U6.2(SO/SIO1) U12.K15(SFC_DR_PA24)
SFC_SIO2: U6.3(W\P\/SIO2) U12.J14(SFC_CE1_PA26)
SFC_SIO3: U6.7(R\E\S\E\T\/SIO3) U12.H15(SFC_GPC_PA25)
SPEAK_EN: R59.1 U10.1(/SD) U12.B7(GPIO_PB31)
SPEED: R51.1 R56.2 U8.12(LED3/PHY_AD3)
TEST_TE: TP20.1 U12.H4(TEST_TE)
TX+: J4.1 U9.16(TX+/RX+)
TX-: J4.2 U9.14(TX-/RX-)
UART1_RXD: J38.3 R237.2 U12.B9(UART1_RXD_TMS_PB24)
UART1_TXD: J38.4 R238.2 U12.A10(UART1_TXD_TCK_PB23)
USB_AVD08: C62.1 C106.1 FB10.1 U12.P7(USB_AVD08)
USB_AVD18: C61.1 C105.1 FB9.1 U12.R5(USB_AVD18)
USB_AVD33: C57.1 C58.1 FB8.1 U12.P5(USB_AVD33)
USB_DM0: J9.2(D-) U12.P4(USB0PN)
USB_DP0: J9.3(D+) U12.R4(USB0PP)
USB_ID: J9.4(ID) R82.1 U12.P6(USB0ID)
ZQ: R83.2 U12.E12(DDR_ZQ)
N04375: D2.2(CATHODE) R13.1
N3362923: J4.6 R56.1
N3362941: J4.8 R57.1
N15313394: C13.2 R8.2 R9.2 U3.3(FB)
N15313450: R7.2 U3.4(EN)
N15313454: C10.1 U3.1(BS)
N15313470: C10.2 L3.1 U3.6(LX)
N15316521: C3.1 R1.2 U1.1(EN)
N15316757: C4.2 R2.1 R3.2 U1.5(FB)
N15316793: L1.1 U1.3(LX)
N15319926: C8.1 R4.2 U2.1(EN)
N15320102: C6.2 R5.2 R6.2 U2.5(FB)
N15320122: L2.1 U2.3(LX)
N15322230: C18.1 R10.2 U4.1(EN)
N15322330: C16.1 R11.1 R12.2 U4.5(FB)
N15322334: L4.1 U4.3(LX)
N15358478: R22.1 U12.A15(GMAC_PHY_CLK_SLCD_D1_PB07)
N15358482: R23.1 U12.B14(GMAC_TXD0_MSC1_D2_I2S_ADC_LRCK_)
N15358486: R24.1 U12.A14(GMAC_TXD1_MSC1_D3_I2S_DAC_MCLK_)
N15358490: R25.1 U12.B13(GMAC_TXEN_MSC1_CLK_I2S_ADC_MCLK)
N15358494: R26.1 U12.D15(GMAC_MDCK_MSC1_D0_I2S_SDTO_SLCD)
N15359340: R29.1 U12.G14(MSC0_CLK_SSI_SLV_CLK_PB04)
N15359934: C69.2 R21.1 Y1.3
N15360440: R30.2 U7.7(WP)
N15378792: U8.30(MDI_TP) U9.1(TD+/RD+)
N15378796: C86.1 C87.1 U8.28(REGOUT)
N15378804: U8.29(MDI_TN) U9.3(TD-/RD-)
N15378850: C90.2 U9.2(CT1)
N15378878: U8.27(MDI_RP) U9.6(RD+/TD+)
N15378882: R54.2 U9.10(CT3) U9.13(MCT) U9.15(CT4)
N15378898: U8.26(MDI_RN) U9.8(RD-/TD-)
N15378902: C89.2 U9.5(CT)
N15378968: C88.2 U9.7(CT2)
N15379006: R52.2 U8.17(RXD1)
N15379034: R50.2 U8.18(RXD0)
N15379500: R58.1 U8.25(ISET)
N15379944: C91.2 R54.1
N15382667: J5.2 U10.5(VO+)
N15382675: J5.1 U10.8(VO-)
N15382715: C95.1 R249.1 U10.6(VDD)
N15382741: R62.1 U10.4(-IN)
N15382761: C94.1 R62.2
N15382769: C93.1 R61.2
N15382881: R61.1 U10.3(+IN)
N15384349: C97.2 C122.2 J7.2 R65.2 R251.2
N15384377: C98.1 C99.1 R65.1 R93.1 R248.1
N15384381: C96.2 C122.1 J7.1 R64.1 R251.1
N15480555: C113.1 R85.2 U11.3(EN)
N16221752: R35.1 U12.R6(VBUS)
N16223536: C68.2 C121.2 U12.M15(VCM)
N16496851: R89.2 R90.2 U12.A1(OSC_BYPASS_CTRL)
N16496901: R91.2 R92.2 U12.C1(POR_CTL)
N16516044: R246.1 R247.2 R248.2

Pads without a net: J1 1 2; J4 5; J18 11; U8 1 3 6 7 14 15 16 21 24; U9 4 12; U10 2; U11 4; U12 B8 F1 F12 G2 H1 H2 H3 J1 J2 K1 K2 N8 P8 P9 P10 P11 P12 P13 P14 P15 R2 R7 R8 R9 R10 R11 R12 R13 R14 R15

## Via types
v1: diameter 0.406, hole 0.203, TOP to BOTTOM, 487 vias

## Routing (per net, layer and track width the routed paths; a pad name or vN(x,y) marks a point on that pad's centre or on a via; arc(x,y) is an arc through that point)
AVDD_PHY: length 3
  TOP w0.203: U8.31 v1(15.61,24.96)
  BOTTOM w0.254: v1(15.61,24.96) 15.02,24.96 C85.1 C84.1 14.04,24.97 FB11.1
GND: length 280.1
  TOP w0.127: v1(23.08,6.73) 23.07,6.72 ; v1(22.86,10.96) 21.96,10.96
  TOP w0.203: U12.M6 v1(30.01,12.91) ; 15.16,23.46 15.61,23.46 U8.33 16.16,22.46 15.16,23.46 ; 15.16,23.46 U8.2 ; U12.G12 v1(26.76,16.16) ; U12.G12 v1(26.11,16.16) ; U12.G12 v1(26.76,16.81) U12.H12 ; v1(26.76,16.16) U12.H11 ; v1(26.76,16.16) U12.H12 ; v1(26.76,16.16) U12.G11 ; U12.H11 v1(27.41,15.51) ; U12.H11 v1(26.76,15.51) ; v1(26.76,14.21) U12.H9 ; v1(26.76,14.21) U12.G9 ; v1(26.76,14.21) U12.H8 ; U12.H9 v1(27.41,14.21) ; U12.H9 v1(26.76,14.86) ; v1(27.41,15.51) U12.J10 ; v1(27.41,15.51) U12.J11 v1(28.06,15.51) ; v1(27.41,15.51) U12.H10 ; v1(27.41,16.81) U12.H12 ; U12.M5 v1(30.01,11.61) U12.M4 ; U12.H5 v1(26.76,11.61) U12.G5 v1(26.11,12.26) ; U12.H5 U12.H6 ; U12.H5 v1(27.41,11.61) U12.J5 U12.J6 ; v1(26.76,13.56) U12.G7 ; v1(26.76,13.56) U12.H8 ; v1(26.76,13.56) U12.H7 ; U12.G7 v1(26.76,12.91) ; U12.G7 v1(26.11,13.56) ; U12.C2 v1(23.51,9.66) ; U12.C8 v1(23.51,13.56) ; v1(26.76,15.51) U12.H10 ; v1(26.76,15.51) U12.G11 ; v1(26.76,15.51) U12.G10 ; U12.H10 v1(26.76,14.86) ; U12.K11 v1(28.06,15.51) ; v1(28.06,15.51) U12.J10 ; v1(28.06,15.51) U12.K10 U12.K9 v1(28.06,14.21) ; U12.G9 v1(26.76,14.86) ; U12.G9 v1(26.11,14.86) ; U12.H6 v1(27.41,12.91) ; U12.H6 v1(26.76,12.91) ; U12.H8 v1(27.41,14.21) ; U12.F5 v1(26.11,12.26) ; U12.F5 U12.F4 ; U12.F5 v1(25.46,12.26) U12.F6 v1(26.11,12.26) ; v1(26.11,12.26) U12.G6 v1(26.76,12.91) ; v1(27.41,14.21) U12.J8 ; v1(27.41,14.21) U12.J9 ; U12.J6 v1(28.06,12.91) ; U12.J6 v1(27.41,12.91) ; U12.J7 U12.J8 ; U12.J7 v1(27.41,12.91) ; U12.J7 v1(28.06,12.91) ; U12.J8 v1(28.06,14.21) ; v1(27.41,12.91) U12.H7 ; U12.G11 v1(26.11,16.16) ; v1(28.06,12.91) U12.K7 U12.K8 v1(28.06,14.21) ; U12.H7 v1(26.76,12.91) ; v1(26.11,16.16) U12.F11 U12.F10 v1(26.11,14.86) ; v1(28.06,14.21) U12.J9 ; U12.J10 U12.J9 ; v1(26.76,14.86) U12.G10 ; U12.G10 v1(26.11,14.86) ; v1(26.11,14.86) U12.F9 ; U12.M12 v1(30.66,15.51)
  TOP w0.254: 18.15,6.1 C69.1 ; C69.1 17.67,6.63 ; C69.1 18.62,6.63 ; U7.4 10.77,14.45 ; U7.4 11.22,13.44 ; U7.4 10.31,13.44 ; 9.29,2.82 SW2.1 ; SW2.1 10.8,3.83 ; SW2.1 12.3,2.82 ; SW2.1 10.8,1.82 ; Y1.4 20.14,9.74 ; Y1.4 19.44,8.99 ; Y1.4 18.74,9.74 ; 8.85,26.8 J4.7 ; J4.7 9.71,27.4 ; J4.7 8,27.4 ; J4.7 8.85,28 ; 35.12,20.97 C70.1 ; C70.1 34.6,21.45 ; C70.1 35.12,21.93 ; C70.1 35.65,21.45 ; 17.19,7.89 Y1.2 ; Y1.2 18.59,7.89 ; Y1.2 17.89,8.65 ; 12.85,13.44 U7.2 ; U7.2 13.31,12.44 ; U7.2 13.31,14.45 ; U7.2 13.76,13.44 ; SW1.1 41.12,34.11 ; SW1.1 40.11,32.61 ; SW1.1 42.12,32.61 ; SW1.1 41.12,31.11 ; v1(39.29,4.98) 38.36,5.91 37.02,5.91 ; R81.1 v1(14.04,14.99) ; 14.12,13.44 U7.1 ; U7.1 15.03,13.44 ; U7.1 14.58,12.44 ; U7.3 12.04,14.45 ; U7.3 12.49,13.44 ; U7.3 11.58,13.44 ; U7.3 12.04,12.44 ; R13.2 34.54,1.68 ; R13.2 34.06,2.21 ; R13.2 33.58,1.68 ; R13.2 34.06,1.15 ; J9.6 42.16,4.71 ; J9.6 39.55,4.71 ; J9.6 40.85,5.71 ; J9.6 40.85,3.7 ; C72.1 14.58,5.78 ; C72.1 15.1,5.3 ; C72.1 v1(14.58,4.45) ; 37.12,10.76 J9.8 39.08,10.76 ; 39.55,11.96 J9.7 ; J9.7 40.85,10.95 ; J9.7 40.85,12.96 ; J9.7 42.16,11.96 ; v1(26.11,13.56) U12.F7 U12.F6 ; v1(26.11,13.56) U12.G8 ; v1(26.11,13.56) U12.F8 U12.F9 ; R82.2 v1(35.15,12.35) ; U12.G8 v1(26.76,13.56) ; U12.G8 v1(26.76,14.21) ; 16.73,7.92 C67.1 ; C67.1 16.73,8.88 ; C67.1 16.21,8.4 ; 39.16,9.63 J9.5 37.3,9.63 ; 19.71,3.86 C100.2 ; C100.2 20.24,3.38 ; C100.2 20.24,4.34 ; C100.2 20.76,3.86 ; 23.07,6.72 R90.1 R92.1 ; 40.28,15.31 U6.4 39.78,14.11
  TOP w0.305: J3.6 34.01,23.24 v1(34.46,22.79)
  TOP w0.381: J3.6 34.01,25.45 34.21,25.65
  L2_GND w0.254: J9.8 38.1,11.61 ; J9.8 38.1,9.9 ; J9.8 39.08,10.76 ; J9.8 37.12,10.76 ; J9.6 42.16,4.71 ; J9.6 40.85,3.7 ; J9.6 39.55,4.71 ; J9.6 40.85,5.71 ; 38.1,5.05 J9.9 ; J9.9 38.1,6.76 ; J9.9 37.12,5.91 ; 39.55,11.96 J9.7 ; J9.7 40.85,10.95 ; J9.7 40.85,12.96 ; J9.7 42.16,11.96
  L3_PWR w0.254: J9.8 38.1,11.61 ; J9.8 38.1,9.9 ; J9.8 39.08,10.76 ; J9.6 42.16,4.71 ; J9.6 39.55,4.71 ; J9.6 40.85,5.71 ; J9.6 40.85,3.7 ; J9.7 42.16,11.96 ; J9.7 40.85,10.95 ; J9.7 39.55,11.96 ; J9.7 40.85,12.96 ; J9.9 38.36,5.91 v1(39.29,4.98) ; J9.9 38.1,6.76 ; J9.9 37.12,5.91
  BOTTOM w0.127: J7.3 41.67,24.15 42.39,24.87 v1(42.39,24.92) ; v1(28.47,32.62) 28.47,32.62
  BOTTOM w0.254: C113.2 16.45,36.12 ; C113.2 15.97,36.65 ; C113.2 15.49,36.12 ; C113.2 15.97,35.59 ; v1(23.51,9.66) 24.11,9.66 C23.1 ; 26.14,19.1 C53.2 27.15,19.1 ; C90.1 13.93,27.81 ; C90.1 14.41,27.28 ; C90.1 13.93,26.75 ; C90.1 13.45,27.28 ; 16.84,23.79 C87.2 16.84,22.83 ; 34.29,9.68 C55.2 33.68,9.17 ; C116.2 21.13,18.14 C45.2 ; C116.2 21.58,18.19 ; C116.2 21.08,18.79 ; C116.2 20.58,18.19 ; v1(21.48,21.64) 20.87,21.64 R47.2 ; R48.2 14.65,20.85 ; R48.2 14.65,19.89 ; R48.2 15.18,20.37 ; C104.2 20.42,16.15 ; C104.2 19.81,15.64 ; C104.2 20.47,15.59 C60.2 ; C104.2 20.42,15.14 ; 14.07,26.56 C84.2 14.07,25.56 ; C52.2 30.84,8.55 C51.2 v1(30.88,8.03) ; C52.2 29.39,8.55 ; C52.2 29.92,9.03 ; C52.2 29.92,8.07 ; C57.2 33.87,12.1 ; C57.2 32.67,12.1 ; C57.2 33.27,11.6 ; 27.85,4.13 J18.10 ; J18.10 27.85,5.74 ; J18.10 27.35,4.93 ; J18.10 28.35,4.93 ; 15.78,17.2 R51.2 ; R51.2 15.3,17.73 ; R51.2 16.26,17.73 ; 32.21,13.97 C61.2 ; C61.2 33.27,13.97 ; C61.2 32.74,13.49 ; 23.59,7.22 C115.2 ; C115.2 23.59,8.18 ; C115.2 24.62,7.7 C114.2 ; C115.2 23.06,7.7 ; C50.2 35,6.72 C49.2 ; C50.2 33.58,6.72 ; C50.2 34.11,7.2 ; v1(26.76,10.31) 27.15,9.92 R19.1 ; 37.96,16.85 R247.1 37.44,16.37 ; 30.37,21.22 C121.1 ; C121.1 30.9,21.7 ; C121.1 31.43,21.22 ; C121.1 30.9,20.74 ; 37.12,5.91 J9.9 ; J9.9 38.1,5.05 ; J9.9 38.1,6.76 ; C111.2 12.64,35.97 ; C111.2 11.43,35.97 ; C111.2 12.04,36.47 ; 17.68,25.3 C88.1 ; C88.1 17.2,25.83 ; C88.1 17.68,26.36 ; C88.1 18.15,25.83 ; C114.2 25.28,7.65 ; C114.2 24.67,8.15 ; 36.3,23.2 C98.2 ; C98.2 36.83,23.68 ; C98.2 36.83,22.72 ; R3.1 6.35,23.52 ; C3.2 12.12,26.28 ; C3.2 11.59,26.76 ; C3.2 11.59,25.8 ; 20.88,8.99 C120.2 ; C120.2 21.94,8.99 ; C120.2 21.41,9.47 ; 23.72,9.76 C23.1 ; C23.1 24.2,9.23 ; C23.1 24.68,9.76 ; C23.1 24.2,10.28 ; C107.2 20.54,7.67 ; C107.2 20.54,6.66 ; C107.2 20.59,7.22 C65.2 ; J18.4 31.35,4.93 ; J18.4 30.85,4.58 31.11,4.32 v1(31.11,3.96) ; J18.4 30.35,4.93 ; 29.99,32.67 C77.2 ; C77.2 30.94,32.67 ; C77.2 30.46,33.2 ; 33.58,14.01 C105.2 ; C105.2 34.79,14.01 ; C105.2 34.18,13.5 ; 29.35,1.43 J18.7 ; J18.7 29.85,2.23 ; J18.7 28.85,2.23 ; C93.2 41.37,32.72 ; C93.2 40.84,32.24 ; C93.2 41.9,32.24 ; C93.2 41.37,31.76 ; 28.47,32.62 R12.1 ; 34.24,29.89 U10.7 36.25,29.89 ; C89.1 16.63,26.54 ; C89.1 16.1,27.02 ; C89.1 15.57,26.54 ; C89.1 16.1,26.06 ; 20.85,21.14 R47.2 ; R47.2 20.37,21.67 ; R47.2 R46.2 v1(21.48,22.48) ; R47.2 21.33,21.67 ; 27.15,9.25 R19.1 ; R19.1 26.67,9.78 ; 15.01,25.53 C85.2 ; C85.2 15.01,26.49 ; C85.2 15.54,26.01 ; C102.2 42.08,6.58 ; C102.2 41.57,5.98 ; C102.2 41.07,6.58 ; C102.2 41.57,7.18 ; 39.51,31.95 R59.2 ; R59.2 39.99,31.42 ; R59.2 39.99,32.48 ; R59.2 40.46,31.95 ; 15.98,31.63 C8.2 ; C8.2 16.51,31.15 ; C8.2 16.51,32.1 ; C106.2 33.2,15.83 C62.2 ; C106.2 33.24,16.38 ; C106.2 33.24,15.37 ; R9.1 12.44,20.93 ; 20.35,4.93 J18.24 ; J18.24 21.35,4.93 ; J18.24 20.85,4.13 ; 14.92,24.08 C92.2 14.44,23.55 ; C60.2 21.33,16.07 ; C60.2 21.33,15.12 ; C60.2 21.86,15.59 ; 22.92,31.42 C18.2 ; C18.2 22.92,32.38 ; C18.2 22.39,31.9 ; 8.83,7.22 J38.2 ; J38.2 10.09,6.72 ; J38.2 10.09,7.73 ; J38.2 11.34,7.22 ; 26.21,18.11 C54.2 ; C54.2 27.17,18.11 ; C54.2 26.69,17.58 ; 22.17,11.36 C48.2 ; C48.2 22.17,12.31 ; C48.2 22.7,11.83 ; C118.2 32.58,17.91 C117.2 ; C118.2 31.19,17.91 ; C118.2 31.72,17.43 ; C118.2 31.72,18.39 ; 37.6,31.95 C95.2 ; C95.2 38.1,31.35 ; C95.2 38.1,32.56 ; 37.01,17.86 R64.2 ; R64.2 36.54,18.39 ; R64.2 37.49,18.39 ; 32.37,26.67 C101.2 ; C101.2 33.33,26.67 ; C101.2 32.85,27.2 ; 7.22,27.38 C5.2 7.83,26.87 ; 31.46,19.23 C68.1 ; C68.1 32.42,19.23 ; C68.1 31.94,18.7 ; C68.1 31.94,19.76 ; 22.85,4.13 J18.20 ; J18.20 23.35,4.93 ; J18.20 22.85,5.74 ; J18.20 22.35,4.93 ; 24.35,4.93 J18.16 ; J18.16 24.85,4.13 ; J18.16 25.35,4.93 ; 32.85,25.3 C81.2 32.37,25.83 ; C65.2 21.48,6.74 ; C65.2 22.01,7.22 ; C65.2 21.48,7.69 ; 17.8,23.81 R58.2 17.8,22.85 ; 32.51,9.22 C56.2 ; C56.2 33.04,9.7 ; C56.2 33.57,9.22 ; C117.2 32.64,18.46 ; C117.2 32.64,17.45 ; 15.9,22.76 C86.2 15.9,23.76 ; 21.48,13.16 C59.2 22.01,12.68 ; 31.85,2.23 J18.1 ; J18.1 32.35,3.04 ; J18.1 32.85,2.23 ; J18.1 32.35,1.43 ; 32.3,15.35 C62.2 ; C62.2 32.3,16.3 ; C62.2 31.78,15.83 ; 39.55,4.71 J9.6 ; J9.6 40.85,5.71 ; J9.6 40.85,3.7 ; J9.6 42.16,4.71 ; R250.1 29,8.53 ; R250.1 29,7.57 ; R250.1 28.47,8.05 ; R250.1 29.53,8.05 ; 40.85,10.95 J9.7 42.16,11.96 ; 21.13,16.72 C45.2 ; C45.2 21.61,17.25 ; C45.2 20.65,17.25 ; C58.2 30.64,11.61 ; C58.2 30.16,11.08 ; C58.2 30.64,10.55 ; R83.1 22.25,15.49 ; R83.1 22.78,15.01 ; R83.1 21.72,15.01 ; C99.2 37.72,23.68 ; C99.2 38.24,23.2 ; C99.2 37.72,22.72 ; R6.1 21.85,34.35 ; 14.35,33.54 U11.2 14.35,35.55
  BOTTOM w0.305: C103.2 21.43,12.63 C59.2 ; C54.2 26.69,19.05 C53.2 ; C47.2 C48.2
  vias: v1(5.61,34.42) v1(5.61,33.61) v1(5.61,32.95) v1(5.61,30.46) v1(5.61,27.76) v1(5.61,25.83) v1(5.61,24.28) v1(5.61,21.97) v1(5.61,20.98) v1(5.61,19) v1(5.61,13.57) v1(5.61,12.17) v1(5.61,9.5) v1(5.61,8.18) v1(5.61,6.71) v1(5.61,3.43) v1(6.35,33.83) v1(6.63,7.52) v1(7.01,33.68) v1(7.72,33.45) v1(7.79,27.31) v1(7.79,26.85) v1(7.79,11.1) v1(7.79,10.54) v1(7.82,4.45) v1(7.92,13.36) v1(7.87,9.22) v1(8.1,6.05) v1(8.43,13.34) v1(8.45,0.61) v1(8.96,37.39) v1(9.01,3.33) v1(9.72,0.61) v1(9.78,25.45) v1(9.83,4.34) v1(10.13,1.42) v1(10.49,16.89) v1(10.46,16.33) v1(10.74,0.61) v1(11.1,16.97) v1(11.12,16.46) v1(11.76,0.61) v1(12.01,20.96) v1(12.26,26.49) v1(12.39,28.6) v1(12.59,4.7) v1(12.67,37.39) v1(12.77,0.61) v1(12.95,2.16) v1(13.2,37.39) v1(13.48,4.14) v1(13.59,1.27) v1(13.84,28.04) v1(13.92,13.49) v1(13.92,0.61) v1(14.25,12.02) v1(14.35,33.38) v1(14.3,28.48) v1(14.73,27.97) v1(14.75,27.31) v1(14.75,26.65) v1(14.88,33.38) v1(15.13,11.66) v1(15.06,0.61) v1(15.19,37.39) v1(15.16,18.16) v1(15.69,22.25) v1(15.69,21.31) v1(15.85,19.25) v1(15.95,22.76) v1(16.05,27.03) v1(16.1,37.39) v1(16.2,7.7) v1(16.2,0.61) v1(16.48,31.04) v1(16.68,22.1) v1(16.79,22.79) v1(16.94,37.39) v1(17.01,10.16) v1(16.96,7.7) v1(17.22,25.6) v1(17.34,26.6) v1(17.34,0.61) v1(17.42,6.73) v1(17.57,22.79) v1(17.57,22.1) v1(17.6,21.39) v1(17.85,10.85) v1(18.31,17.65) v1(18.31,5.95) v1(18.36,0.61) v1(18.49,32.69) v1(18.59,26.54) v1(18.77,37.39) v1(18.77,30.51) v1(19,32.69) v1(19.1,10.85) v1(19.25,18.11) v1(19.17,15.65) v1(19.38,0.61) v1(19.5,2.29) v1(19.63,37.39) v1(19.73,15.65) v1(19.73,6.15) v1(19.81,4.52) v1(19.91,25.5) v1(19.96,18.08) v1(20.39,34.55) v1(20.44,17.81) v1(20.52,0.61) v1(20.87,4.06) v1(21.03,37.39) v1(21.23,34.52) v1(21.43,18.8) v1(21.38,6.76) v1(21.81,0.61) v1(22.04,34.55) v1(21.99,8.99) v1(22.02,7.75) v1(22.09,28.68) v1(22.14,27.69) v1(22.22,30.28) v1(22.3,37.39) v1(22.65,0.61) v1(22.81,31.32) v1(23.01,19.18) v1(22.96,7.85) v1(22.96,7.42) v1(23.51,14.86) v1(23.51,12.26) v1(23.51,10.96) v1(23.57,37.39) v1(23.67,26.09) v1(23.72,0.61) v1(24.43,37.39) v1(24.68,3.91) v1(24.74,3.25) v1(25.02,32.74) v1(25.12,34.34) v1(25.09,26.16) v1(25.14,0.61) v1(25.19,30.56) v1(25.32,37.39) v1(25.35,3.94) v1(25.7,30.15) v1(25.83,8.08) v1(26.01,6.4) v1(25.95,3.15) v1(26.23,37.39) v1(26.29,0.61) v1(26.41,29.8) v1(26.74,34.39) v1(26.92,6.43) v1(26.87,3.94) v1(26.87,3.05) v1(27.38,37.39) v1(27.43,0.61) v1(27.53,8.46) v1(28.01,5.89) v1(27.99,3.96) v1(28.52,37.39) v1(28.52,7.8) v1(28.62,1.27) v1(28.57,0.61) v1(28.77,27.71) v1(28.88,34.37) v1(29.21,33.12) v1(29.18,6.83) v1(29.23,3.99) v1(29.41,1.27) v1(29.56,27.28) v1(29.64,7.39) v1(29.74,3.23) v1(29.7,0.61) v1(29.87,32.67) v1(30.27,6.88) v1(30.43,1.3) v1(30.45,33.25) v1(30.45,26.54) v1(30.66,14.21) v1(30.84,0.61) v1(31.21,6.86) v1(31.31,14.86) v1(31.75,1.24) v1(31.82,37.39) v1(31.82,19.89) v1(31.96,16.16) v1(31.99,0.61) v1(32.1,13.9) v1(32.1,13.31) v1(32.2,34.37) v1(32.28,18.52) v1(32.46,10.54) v1(32.46,9.09) v1(32.58,11.71) v1(32.64,7.11) v1(32.58,5.31) v1(32.61,3.07) v1(32.68,32.72) v1(32.68,30.61) v1(32.74,20.37) v1(32.84,37.39) v1(32.84,18.52) v1(32.79,16.28) v1(33.02,1.96) v1(33.19,3.78) v1(33.42,6.68) v1(33.37,0.61) v1(33.55,27.18) v1(33.55,26.31) v1(33.55,5.31) v1(33.63,9.2) v1(33.73,37.39) v1(33.73,27.99) v1(33.83,32.72) v1(33.96,30.2) v1(34.06,19.1) v1(34.21,22.02) v1(34.62,18.47) v1(34.55,0.61) v1(34.74,37.39) v1(34.87,26.85) v1(34.95,14.61) v1(35.05,11.84) v1(35,5.28) v1(35.1,32.26) v1(35.12,17.98) v1(35.4,0.61) v1(35.63,37.39) v1(35.63,27.91) v1(35.61,17.53) v1(35.58,13.84) v1(35.68,31.55) v1(35.78,22.02) v1(35.91,4.11) v1(36.34,29.92) v1(36.27,0.61) v1(36.62,26.97) v1(36.83,25.45) v1(36.8,6.88) v1(36.8,6.25) v1(36.8,5.51) v1(36.85,28.3) v1(37.04,0.61) v1(37.16,8.59) v1(37.16,7.42) v1(37.69,30.58) v1(37.72,17.98) v1(37.77,25.37) v1(37.77,18.62) v1(37.97,26.57) v1(38.02,0.61) v1(38.1,31.17) v1(38.27,29.84) v1(38.38,23.34) v1(38.43,21.36) v1(38.4,16.79) v1(38.45,28.32) v1(38.71,17.91) v1(38.93,37.39) v1(39.06,0.61) v1(39.24,23.85) v1(39.24,4.01) v1(39.65,21.34) v1(39.65,14.63) v1(39.7,28.04) v1(39.67,26.62) v1(39.67,13.54) v1(39.82,9.83) v1(39.85,9.12) v1(39.95,19.18) v1(41.47,10.39) v1(42.39,34.16) v1(42.39,31.15) v1(42.39,29.92) v1(42.39,28.77) v1(42.39,27.88) v1(42.39,27) v1(42.39,21.46) v1(42.39,19.74) v1(42.39,17.45) v1(42.39,14.14) v1(42.39,12.65) v1(42.39,11.06) v1(42.39,9.59) v1(42.39,8.35) v1(42.39,6.96) v1(42.39,5.92) v1(42.39,4.81) v1(42.39,3.94)
VCC_0V8: length 59.3
  L3_PWR w0.381: 32.91,15.44 33.27,15.44 ; 32.91,15.44 31.85,15.44 31.11,16.18 30.5,16.18 30.12,16.56 30.12,17.22 29.08,18.26 27.02,18.26 ; 32.91,15.44 33.27,15.09 ; 33.27,15.44 33.27,15.09 ; 33.27,15.44 33.63,15.44 ; v1(18.56,15.65) 18.56,15.82 18.94,16.21 20.52,16.21 22.58,18.26 26.41,18.26 ; 26.41,18.26 27.02,18.26 ; 26.41,18.26 26.72,18.57 ; 33.27,15.09 33.27,13.87 34.01,13.13 35.4,13.13 37,11.53 37,9.48 35.99,8.46 35.99,6.15 v1(36.06,6.07) ; 33.27,15.09 33.63,15.44 ; v1(34.99,15.39) 33.68,15.39 33.63,15.44 ; 27.02,18.26 26.72,18.57 ; 26.72,18.57 v1(26.72,27.18)
  BOTTOM w0.203: R11.2 C16.2 28.47,29.54 27,28.07 ; v1(36.06,6.07) FB4.2
  BOTTOM w0.305: FB2.2 18.56,14.79 v1(18.56,15.65)
  BOTTOM w0.381: v1(34.99,15.39) 34.5,15.88 FB10.2 ; v1(36.06,6.07) 28.95,6.07 26.95,8.07 FB12.2
VCC_1V8: length 81.6
  TOP w0.203: v1(18.89,5.62) 18.59,5.31 R77.1
  TOP w0.254: v1(18.89,5.62) 19.35,5.16 R91.1 R89.1
  L3_PWR w0.381: 22.68,25.55 22.68,21.74 21,20.07 19.76,20.07 17.65,17.96 17.65,15.44 20.29,12.8 20.29,8.74 ; 22.68,25.55 20.52,27.71 v1(17.34,27.71) ; 22.68,25.55 v1(25.09,25.55) ; 20.29,8.74 20.29,8.38 ; 20.29,8.74 20.65,8.38 ; v1(18.89,5.62) 18.89,6.99 20.29,8.38 ; 20.29,8.38 20.65,8.38 ; v1(36.32,10.54) 35.66,9.88 32.14,9.88 31.68,9.43 24.46,9.43 23.42,8.38 20.65,8.38
  BOTTOM w0.203: 18.41,27.18 17.35,27.18 TP13.1
  BOTTOM w0.305: v1(18.89,5.62) 18.89,7.29 ; 18.89,7.29 18.89,9.47 FB13.2 19.63,10.2 19.63,11.66 ; 18.89,7.29 19.03,7.15 FB3.2 ; 19.63,11.66 19.81,11.84 ; 19.63,11.66 19.63,12.01 ; 19.81,11.84 19.63,12.01 ; 19.81,11.84 19.81,11.83 R18.1 ; FB1.2 19.63,12.49 19.63,12.01 ; v1(25.09,25.55) 25.09,21.71 FB6.2
  BOTTOM w0.381: FB9.2 36.32,13.02 v1(36.32,10.54) 36.32,9.54 35.94,9.16 FB7.2 35.33,8.83 34.95,8.46 32.02,8.46 FB5.2
VCC_3V3: length 55.7
  TOP w0.203: U8.13 16.81,20.07 v1(17.06,19.81) ; v1(21.38,23.55) 21.14,23.55 R49.2 ; 37.51,3.38 D2.1 ; R31.2 R32.2 R30.1 13.78,5.32 13.95,5.5 v1(13.95,6.34)
  TOP w0.305: v1(13.95,6.34) C72.2 U7.8
  TOP w0.381: v1(39.14,12.47) 38.4,11.74 v1(35.68,11.74) ; 36.32,22.71 40.23,22.71 ; 36.32,22.71 36.47,22.56 U6.8 ; 36.32,22.71 35.34,22.71 C70.2 ; 40.23,22.71 40.09,22.85 R71.2 ; 40.23,22.71 41.12,22.71 41.5,22.33 41.5,18.45 v1(39.63,16.59)
  TOP w0.508: v1(27.83,1.24) 27.17,1.24 R69.1
  BOTTOM w0.203: R237.1 R238.1 v1(13.69,9.22) ; v1(21.38,23.55) 21.08,23.55 R45.2 ; 7.22,27.97 6.6,27.97 6.35,27.71 6.35,26.01 R2.2 C4.1 ; R85.1 13.4,35.88 U11.1
  BOTTOM w0.254: v1(12.37,24.56) 12.37,25.45 12.99,26.07 FB11.2 ; v1(17.06,19.81) 17.06,20.88 16.18,21.77 R44.2 ; v1(13.95,6.34) 10.2,6.34 J38.1
  BOTTOM w0.305: R16.1 22.07,22.86 v1(21.38,23.55) ; R87.1 33.7,18.01 v1(33.7,18.36) ; v1(39.63,16.59) 39.63,16.16 R246.2 ; R44.2 R55.2
  BOTTOM w0.381: FB8.2 35.24,11.13 35.68,11.56 v1(35.68,11.74)
  BOTTOM w0.508: Q1.2 31.5,30.97 R42.1 C77.1 v1(31.5,33.39)
  vias: v1(11.91,32.28) v1(11.98,32.72) v1(12.26,33.1) v1(12.72,33.17) v1(12.87,33.66) v1(37.64,4.57) v1(38.32,4.52) v1(38.43,3.84) v1(38.43,3.15)
VCC_5V: length 43.6
  TOP w0.203: R35.2 35,13.26 35.86,12.4 v1(37.36,12.4)
  TOP w0.508: v1(12.8,3.89) 15.39,1.3 21.74,1.3 R68.1
  L3_PWR w0.203: v1(39.62,33.12) 36.88,35.87 23.95,35.87
  BOTTOM w0.203: 39.21,7.77 39.21,11.48 38.3,12.4 v1(37.36,12.4) ; R8.1 C13.1 10.05,20.61 10.05,20.88 ; R4.1 17.22,34.42 17.45,34.65 ; 23.08,35.69 22.92,35.52 R10.1 ; R1.1 10.44,23.43 U1.4
  BOTTOM w0.254: C102.1 40.48,7.11 ; C102.1 40.48,6.05 ; C102.1 40.06,6.58
  BOTTOM w0.381: R249.2 v1(39.62,33.12)
  vias: v1(6.68,19.46) v1(6.68,18.62) v1(7.11,18.98) v1(7.57,19.43) v1(7.59,18.65) v1(22.25,36.76) v1(22.25,35.99) v1(22.78,36.35) v1(23.31,36.73) v1(23.34,36.02) v1(39.19,6.4) v1(39.44,6.91) v1(39.47,5.92) v1(39.72,6.4) v1(41.07,14.25) v1(41.09,13.46) v1(41.6,14.63) v1(41.6,14.02)
VCC_12V: length 4
  BOTTOM w0.203: 11.3,15.75 11.55,16 12.92,16 R7.1 15.03,15.72 TP2.1
  vias: v1(10.51,10.44) v1(10.56,11.03) v1(10.82,10.03) v1(11.1,11.03) v1(11.1,10.39)
VCC_DDR: length 2.8
  BOTTOM w0.203: 21.15,30.02 21.85,30.72 R5.1 C6.1
VDD: length 16.5
  TOP w0.203: v1(29.36,15.51) U12.L11 v1(29.36,16.16) ; v1(29.36,15.51) U12.L10 v1(29.36,14.86) ; v1(29.36,15.51) U12.M10 v1(29.36,14.86) ; v1(29.36,15.51) U12.M11 v1(29.36,16.16) ; U12.J12 U12.K12 v1(28.71,16.81) U12.L12 ; v1(29.36,14.86) U12.L9 v1(29.36,14.21) ; v1(29.36,14.86) U12.M9 v1(29.36,14.21) ; v1(29.36,14.21) U12.M8 v1(29.36,13.56) ; v1(29.36,14.21) U12.L8 v1(29.36,13.56) ; v1(28.71,12.26) U12.K5 v1(28.71,11.61) ; v1(28.71,12.26) U12.L6 v1(28.71,12.91) ; v1(28.71,12.26) U12.K6 v1(28.71,12.91) ; v1(28.71,12.26) U12.L5 v1(28.71,11.61) ; v1(28.71,12.91) U12.L7 v1(29.36,13.56) ; v1(28.71,11.61) U12.K4 U12.J4 ; v1(28.71,11.61) U12.L4 ; v1(29.36,13.56) U12.M7 ; v1(29.36,16.16) U12.L12 ; U12.L12 v1(29.36,16.81)
VDDIO1: length 4.1
  TOP w0.203: U12.C13 v1(23.51,17.46)
  BOTTOM w0.305: R16.2 22.17,19.33 C116.1 C45.1 22.38,17.46 v1(23.51,17.46)
VDDIO2: length 3.4
  TOP w0.203: U12.N13 v1(30.66,16.81)
  BOTTOM w0.305: R87.2 C117.1 31.72,16.87 C118.1 31.66,16.81 v1(30.66,16.81)
VDDIO_D: length 3.8
  TOP w0.203: U12.C3 v1(23.51,10.31)
  BOTTOM w0.305: R18.2 C47.1 C48.1 22.66,10.31 v1(23.51,10.31)
VDDIO_OSC: length 2.3
  TOP w0.203: U12.A2 v1(22.21,9.66)
  BOTTOM w0.305: FB13.1 C120.1 21.83,10.03 v1(22.21,9.66)
VDDMEM: length 14.9
  TOP w0.203: U12.D7 U12.D6 ; U12.D7 v1(24.16,13.56) U12.D8 ; U12.D7 v1(24.81,13.56) ; U12.D6 v1(24.81,12.26) ; U12.D6 v1(24.16,12.26) U12.D5 ; v1(24.81,12.26) U12.E6 U12.E7 v1(24.81,13.56) ; v1(24.81,12.26) U12.D5 ; v1(24.81,12.26) U12.E5 v1(24.81,11.61) ; v1(24.81,13.56) U12.E8 U12.E9 v1(24.81,14.86) ; v1(24.81,13.56) U12.D8 ; U12.D8 U12.D9 ; v1(24.81,14.86) U12.E10 U12.E11 ; v1(24.81,14.86) U12.D9 ; v1(24.81,14.86) U12.D10 ; U12.D9 v1(24.16,14.86) U12.D10 ; U12.D10 U12.D11 v1(24.81,16.16) ; U12.D5 v1(24.81,11.61) ; v1(24.81,11.61) U12.E4
  TOP w0.254: U12.D11 v1(24.16,16.16) ; v1(24.81,16.16) U12.E11
VDDMSC0: length 13.6
  TOP w0.203: J3.4 v1(31.81,25.31)
  BOTTOM w0.203: 31.8,24.89 31.81,24.89 31.96,24.74 ; 31.8,24.89 31.8,25.31 v1(31.81,25.31) ; 31.8,24.89 31.8,24.59 ; 31.96,24.74 31.8,24.59 ; 31.96,24.74 33.4,24.74 33.64,24.98 33.64,25.45 R37.1 33.64,25.52 34.39,26.27 R39.1 ; 31.8,24.59 31.8,23.93 31.51,23.64 30.71,23.64 R38.1 29.59,23.64 R41.1 28.5,23.64 R40.1
  BOTTOM w0.457: Q1.3 31.81,27.01 C101.1 C81.1 31.81,25.83 v1(31.81,25.31)
ADC0: length 2.3
  TOP w0.102: TP12.1 32.84,9.65 31.31,9.65 U12.P2
